# EAGLE board USB C Vertical Breakout-PTH-Panel (EAGLE 9.6.2), part 1 of 5
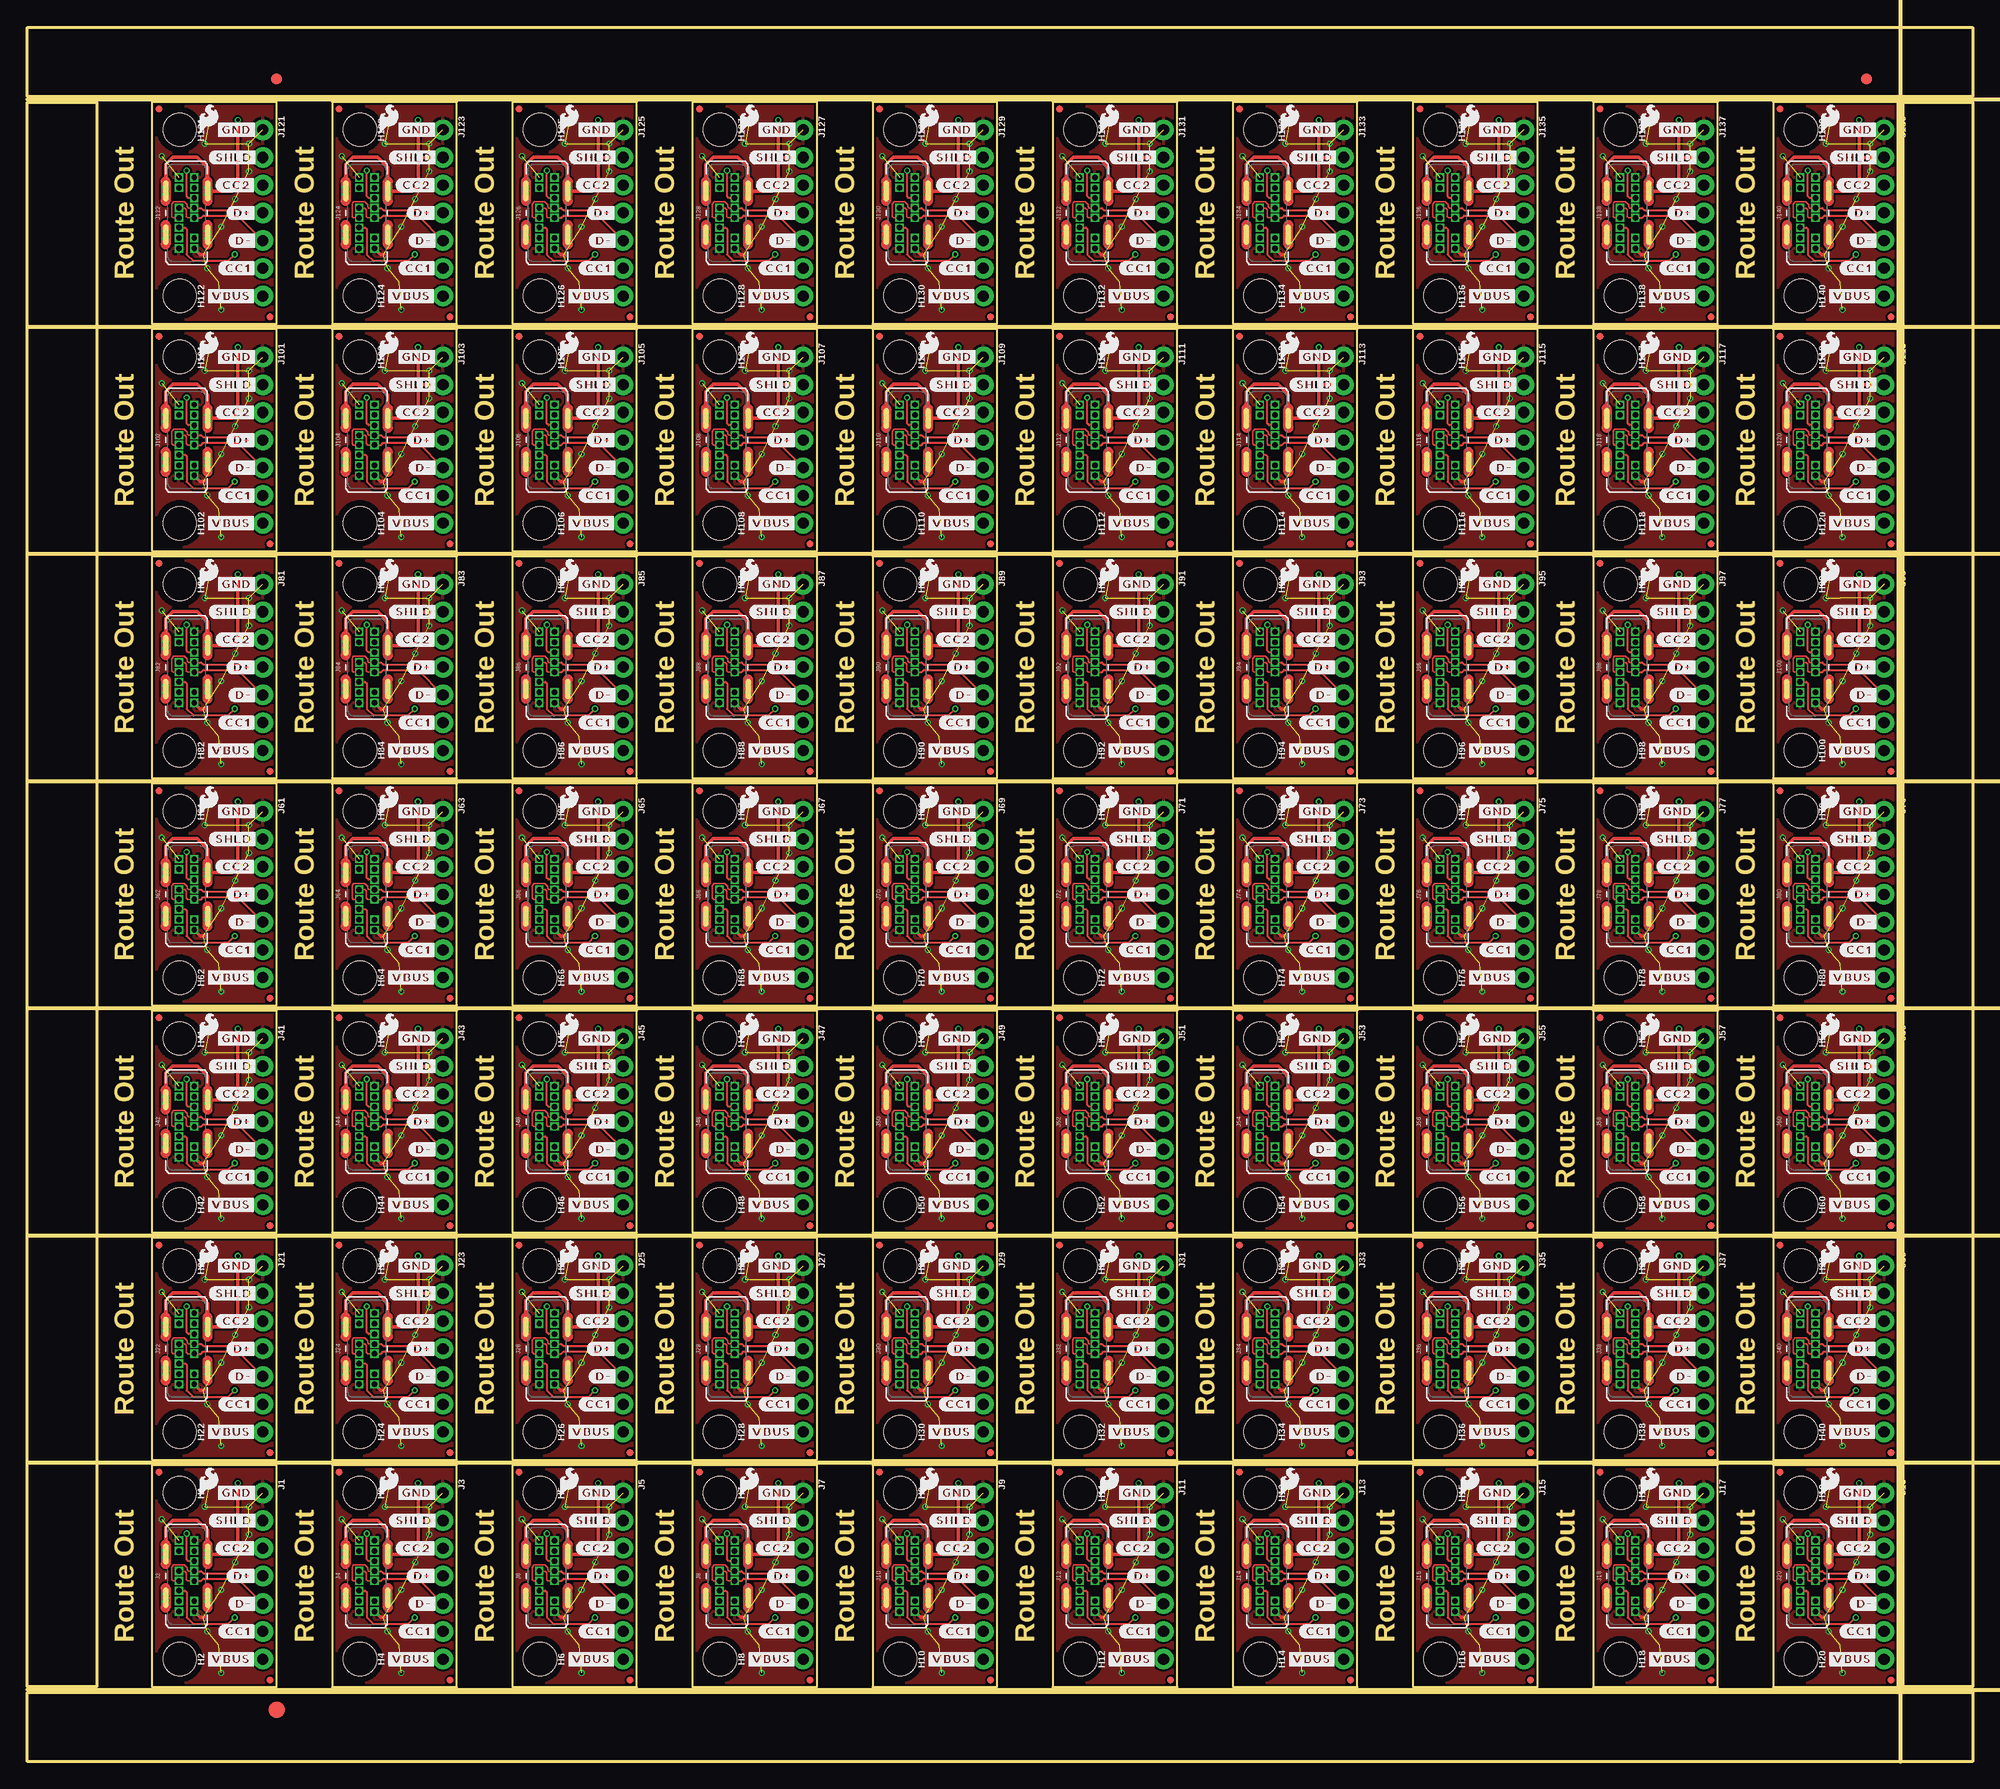
[diagram p0: board, top side]
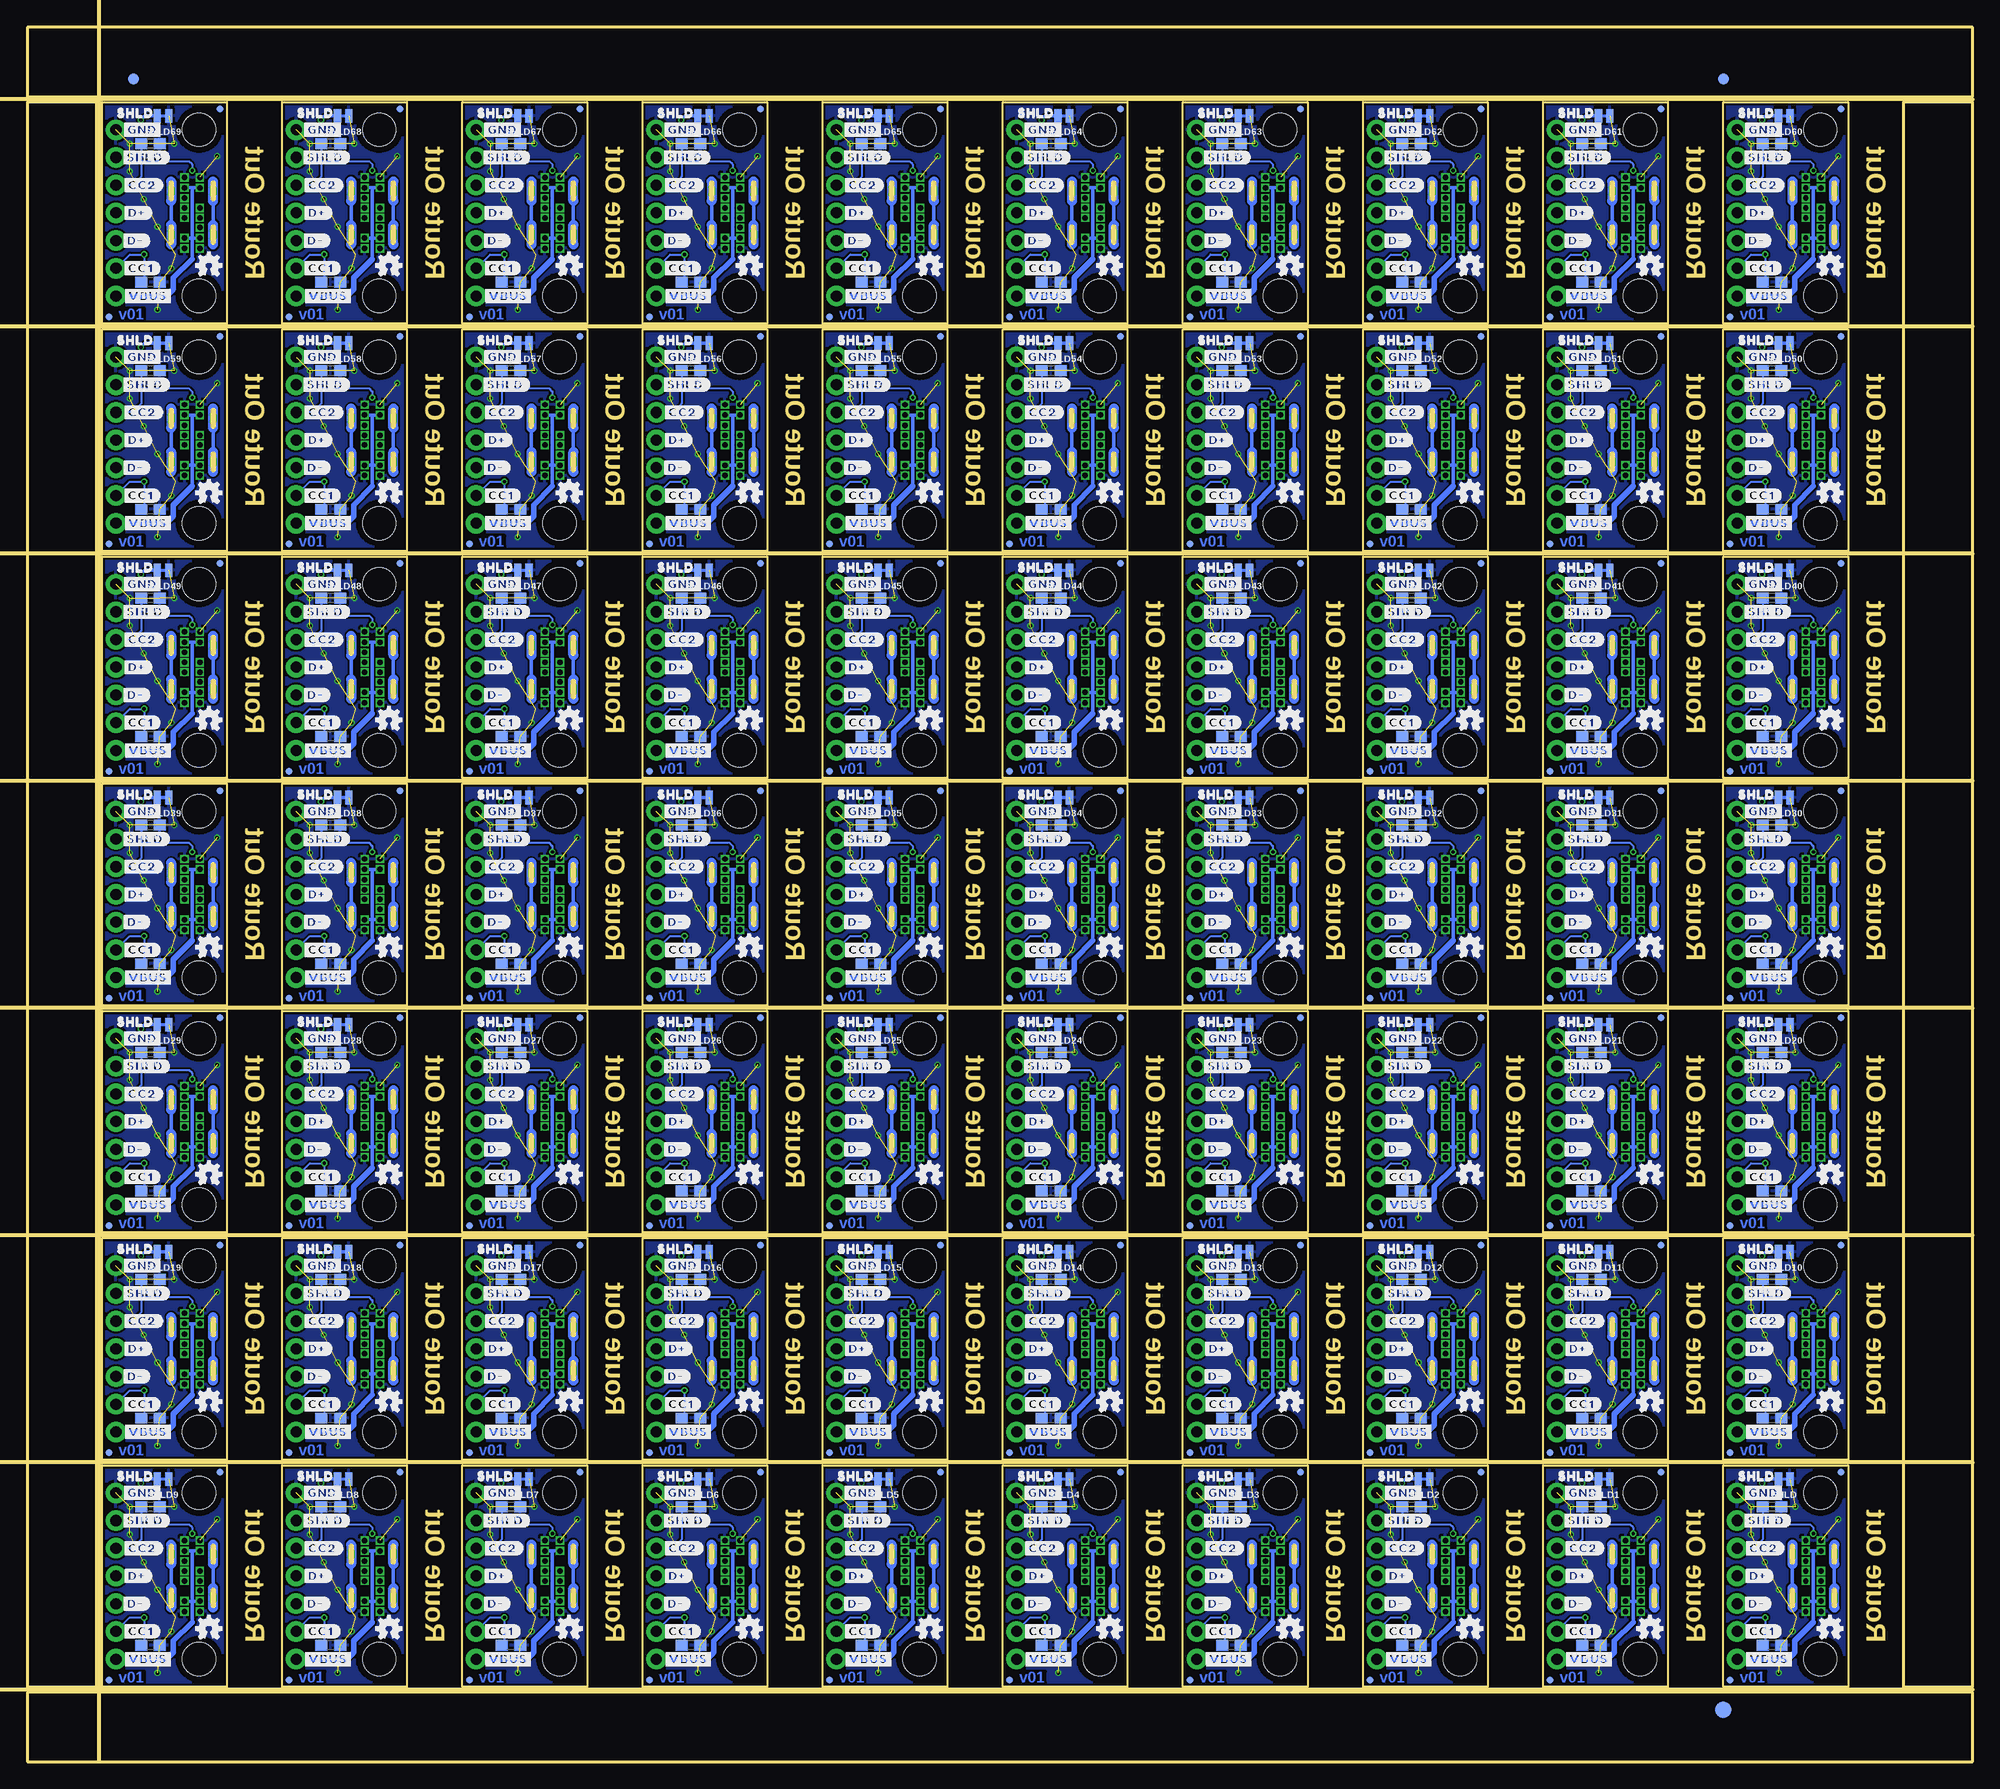
[diagram p1: board, bottom side, seen from below]

Size 178.31 x 159 mm. Coordinates in mm from the lower left corner, seen from the top.
Outline: 296 segments
Copper layers (1*16): Top 0.035mm / dielectric 1.5mm / Bottom 0.035mm
Design rules "USB C Vertical Breakout-PTH": minimum track width 5mil, minimum drill 0.3mm, track to track 5mil, track to pad 5mil, pad to pad 5mil, via to via 5mil, smd to smd 5mil, copper to edge 7mil, drill to drill 7mil, minimum pad ring 5mil, minimum via ring 5mil, stop-mask expansion 2.5mil, vias tented up to drill 25mil, thermal gap 10mil
Net classes: 0 default: width 0 mm, drill 0 mm
Milling: 9 lines

## Footprints (pad centres in the part's own frame; a part is rotated, then mirrored left to right if it is on the bottom)
FIDUCIAL-1X2 = smd 1 x 1: 1 0,0
FIDUCIAL-1.5X3 = smd 1.5 x 1.5: 1 0,0
FIDUCIAL-MICRO = smd 0.635 x 0.635: 1 0,0
STAND-OFF-TIGHT = hole 3.048: 0,0
1X07_NO_SILK = drill 1.016 pad 1.88: 1 0,0; 2 2.54,0; 3 5.08,0; 4 7.62,0; 5 10.16,0; 6 12.7,0; 7 15.24,0
USB-C-8P-2LAYER-VERTICAL-PTH = drill 0.5 pad 0.65 square: A1 -3.25,0.7; A4 -2.3,0.7; A5 -1.35,0.7; A6 -0.45,0.7; A7 0.45,0.7; A9 2.3,0.7; A12 3.25,0.7; B1 3.25,-0.7; B4 2.3,-0.7; B5 1.35,-0.7; B6 0.45,-0.7; B7 -0.45,-0.7; B9 -2.3,-0.7; B12 -3.25,-0.7 | drill 0.4 pad 0.6 long: SHLD1 -2,1.93; SHLD2 2,1.93; SHLD3 2,-1.93; SHLD4 -2,-1.93
0603 = smd 1.1 x 1: 1 -0.85,0; 2 0.85,0
SMT-JUMPER_2_NC_TRACE_NO-SILK = smd 0.66 x 1.27: 1 -0.521,0; 2 0.521,0

## Placement (x,y rotation side)
E$1  [FIDUCIAL-1X2]  22.86,154.24 0 top
E$2  [FIDUCIAL-1X2]  22.86,154.24 0 bottom
E$3  [FIDUCIAL-1X2]  168.59,154.24 0 top
E$4  [FIDUCIAL-1X2]  168.59,154.24 0 bottom
E$5  [FIDUCIAL-1.5X3]  22.86,4.76 0 top
E$6  [FIDUCIAL-1.5X3]  22.86,4.76 0 bottom
FD1  FIDUCIALUFIDUCIAL  [FIDUCIAL-MICRO]  12.06,26.54 90 top
FD2  FIDUCIALUFIDUCIAL  [FIDUCIAL-MICRO]  12.06,26.54 90 bottom
FD3  FIDUCIALUFIDUCIAL  [FIDUCIAL-MICRO]  22.23,7.49 270 top
FD4  FIDUCIALUFIDUCIAL  [FIDUCIAL-MICRO]  22.23,7.49 90 bottom
FD5  FIDUCIALUFIDUCIAL  [FIDUCIAL-MICRO]  28.57,26.54 90 top
FD6  FIDUCIALUFIDUCIAL  [FIDUCIAL-MICRO]  28.57,26.54 90 bottom
FD7  FIDUCIALUFIDUCIAL  [FIDUCIAL-MICRO]  38.73,7.49 270 top
FD8  FIDUCIALUFIDUCIAL  [FIDUCIAL-MICRO]  38.73,7.49 90 bottom
FD9  FIDUCIALUFIDUCIAL  [FIDUCIAL-MICRO]  45.09,26.54 90 top
FD10  FIDUCIALUFIDUCIAL  [FIDUCIAL-MICRO]  45.09,26.54 90 bottom
FD11  FIDUCIALUFIDUCIAL  [FIDUCIAL-MICRO]  55.24,7.49 270 top
FD12  FIDUCIALUFIDUCIAL  [FIDUCIAL-MICRO]  55.24,7.49 90 bottom
FD13  FIDUCIALUFIDUCIAL  [FIDUCIAL-MICRO]  61.59,26.54 90 top
FD14  FIDUCIALUFIDUCIAL  [FIDUCIAL-MICRO]  61.59,26.54 90 bottom
FD15  FIDUCIALUFIDUCIAL  [FIDUCIAL-MICRO]  71.75,7.49 270 top
FD16  FIDUCIALUFIDUCIAL  [FIDUCIAL-MICRO]  71.75,7.49 90 bottom
FD17  FIDUCIALUFIDUCIAL  [FIDUCIAL-MICRO]  78.1,26.54 90 top
FD18  FIDUCIALUFIDUCIAL  [FIDUCIAL-MICRO]  78.1,26.54 90 bottom
FD19  FIDUCIALUFIDUCIAL  [FIDUCIAL-MICRO]  88.26,7.49 270 top
FD20  FIDUCIALUFIDUCIAL  [FIDUCIAL-MICRO]  88.26,7.49 90 bottom
FD21  FIDUCIALUFIDUCIAL  [FIDUCIAL-MICRO]  94.62,26.54 90 top
FD22  FIDUCIALUFIDUCIAL  [FIDUCIAL-MICRO]  94.62,26.54 90 bottom
FD23  FIDUCIALUFIDUCIAL  [FIDUCIAL-MICRO]  104.78,7.49 270 top
FD24  FIDUCIALUFIDUCIAL  [FIDUCIAL-MICRO]  104.78,7.49 90 bottom
FD25  FIDUCIALUFIDUCIAL  [FIDUCIAL-MICRO]  111.12,26.54 90 top
FD26  FIDUCIALUFIDUCIAL  [FIDUCIAL-MICRO]  111.12,26.54 90 bottom
FD27  FIDUCIALUFIDUCIAL  [FIDUCIAL-MICRO]  121.28,7.49 270 top
FD28  FIDUCIALUFIDUCIAL  [FIDUCIAL-MICRO]  121.28,7.49 90 bottom
FD29  FIDUCIALUFIDUCIAL  [FIDUCIAL-MICRO]  127.63,26.54 90 top
FD30  FIDUCIALUFIDUCIAL  [FIDUCIAL-MICRO]  127.63,26.54 90 bottom
FD31  FIDUCIALUFIDUCIAL  [FIDUCIAL-MICRO]  137.79,7.49 270 top
FD32  FIDUCIALUFIDUCIAL  [FIDUCIAL-MICRO]  137.79,7.49 90 bottom
FD33  FIDUCIALUFIDUCIAL  [FIDUCIAL-MICRO]  144.15,26.54 90 top
FD34  FIDUCIALUFIDUCIAL  [FIDUCIAL-MICRO]  144.15,26.54 90 bottom
FD35  FIDUCIALUFIDUCIAL  [FIDUCIAL-MICRO]  154.31,7.49 270 top
FD36  FIDUCIALUFIDUCIAL  [FIDUCIAL-MICRO]  154.31,7.49 90 bottom
FD37  FIDUCIALUFIDUCIAL  [FIDUCIAL-MICRO]  160.66,26.54 90 top
FD38  FIDUCIALUFIDUCIAL  [FIDUCIAL-MICRO]  160.66,26.54 90 bottom
FD39  FIDUCIALUFIDUCIAL  [FIDUCIAL-MICRO]  170.81,7.49 270 top
FD40  FIDUCIALUFIDUCIAL  [FIDUCIAL-MICRO]  170.81,7.49 90 bottom
FD41  FIDUCIALUFIDUCIAL  [FIDUCIAL-MICRO]  12.06,47.37 90 top
FD42  FIDUCIALUFIDUCIAL  [FIDUCIAL-MICRO]  12.06,47.37 90 bottom
FD43  FIDUCIALUFIDUCIAL  [FIDUCIAL-MICRO]  22.23,28.32 270 top
FD44  FIDUCIALUFIDUCIAL  [FIDUCIAL-MICRO]  22.23,28.32 90 bottom
FD45  FIDUCIALUFIDUCIAL  [FIDUCIAL-MICRO]  28.57,47.37 90 top
FD46  FIDUCIALUFIDUCIAL  [FIDUCIAL-MICRO]  28.57,47.37 90 bottom
FD47  FIDUCIALUFIDUCIAL  [FIDUCIAL-MICRO]  38.73,28.32 270 top
FD48  FIDUCIALUFIDUCIAL  [FIDUCIAL-MICRO]  38.73,28.32 90 bottom
FD49  FIDUCIALUFIDUCIAL  [FIDUCIAL-MICRO]  45.09,47.37 90 top
FD50  FIDUCIALUFIDUCIAL  [FIDUCIAL-MICRO]  45.09,47.37 90 bottom
FD51  FIDUCIALUFIDUCIAL  [FIDUCIAL-MICRO]  55.24,28.32 270 top
FD52  FIDUCIALUFIDUCIAL  [FIDUCIAL-MICRO]  55.24,28.32 90 bottom
FD53  FIDUCIALUFIDUCIAL  [FIDUCIAL-MICRO]  61.59,47.37 90 top
FD54  FIDUCIALUFIDUCIAL  [FIDUCIAL-MICRO]  61.59,47.37 90 bottom
FD55  FIDUCIALUFIDUCIAL  [FIDUCIAL-MICRO]  71.75,28.32 270 top
FD56  FIDUCIALUFIDUCIAL  [FIDUCIAL-MICRO]  71.75,28.32 90 bottom
FD57  FIDUCIALUFIDUCIAL  [FIDUCIAL-MICRO]  78.1,47.37 90 top
FD58  FIDUCIALUFIDUCIAL  [FIDUCIAL-MICRO]  78.1,47.37 90 bottom
FD59  FIDUCIALUFIDUCIAL  [FIDUCIAL-MICRO]  88.26,28.32 270 top
FD60  FIDUCIALUFIDUCIAL  [FIDUCIAL-MICRO]  88.26,28.32 90 bottom
FD61  FIDUCIALUFIDUCIAL  [FIDUCIAL-MICRO]  94.62,47.37 90 top
FD62  FIDUCIALUFIDUCIAL  [FIDUCIAL-MICRO]  94.62,47.37 90 bottom
FD63  FIDUCIALUFIDUCIAL  [FIDUCIAL-MICRO]  104.78,28.32 270 top
FD64  FIDUCIALUFIDUCIAL  [FIDUCIAL-MICRO]  104.78,28.32 90 bottom
FD65  FIDUCIALUFIDUCIAL  [FIDUCIAL-MICRO]  111.12,47.37 90 top
FD66  FIDUCIALUFIDUCIAL  [FIDUCIAL-MICRO]  111.12,47.37 90 bottom
FD67  FIDUCIALUFIDUCIAL  [FIDUCIAL-MICRO]  121.28,28.32 270 top
FD68  FIDUCIALUFIDUCIAL  [FIDUCIAL-MICRO]  121.28,28.32 90 bottom
FD69  FIDUCIALUFIDUCIAL  [FIDUCIAL-MICRO]  127.63,47.37 90 top
FD70  FIDUCIALUFIDUCIAL  [FIDUCIAL-MICRO]  127.63,47.37 90 bottom
FD71  FIDUCIALUFIDUCIAL  [FIDUCIAL-MICRO]  137.79,28.32 270 top
FD72  FIDUCIALUFIDUCIAL  [FIDUCIAL-MICRO]  137.79,28.32 90 bottom
FD73  FIDUCIALUFIDUCIAL  [FIDUCIAL-MICRO]  144.15,47.37 90 top
FD74  FIDUCIALUFIDUCIAL  [FIDUCIAL-MICRO]  144.15,47.37 90 bottom
FD75  FIDUCIALUFIDUCIAL  [FIDUCIAL-MICRO]  154.31,28.32 270 top
FD76  FIDUCIALUFIDUCIAL  [FIDUCIAL-MICRO]  154.31,28.32 90 bottom
FD77  FIDUCIALUFIDUCIAL  [FIDUCIAL-MICRO]  160.66,47.37 90 top
FD78  FIDUCIALUFIDUCIAL  [FIDUCIAL-MICRO]  160.66,47.37 90 bottom
FD79  FIDUCIALUFIDUCIAL  [FIDUCIAL-MICRO]  170.81,28.32 270 top
FD80  FIDUCIALUFIDUCIAL  [FIDUCIAL-MICRO]  170.81,28.32 90 bottom
FD81  FIDUCIALUFIDUCIAL  [FIDUCIAL-MICRO]  12.06,68.2 90 top
FD82  FIDUCIALUFIDUCIAL  [FIDUCIAL-MICRO]  12.06,68.2 90 bottom
FD83  FIDUCIALUFIDUCIAL  [FIDUCIAL-MICRO]  22.23,49.15 270 top
FD84  FIDUCIALUFIDUCIAL  [FIDUCIAL-MICRO]  22.23,49.15 90 bottom
FD85  FIDUCIALUFIDUCIAL  [FIDUCIAL-MICRO]  28.57,68.2 90 top
FD86  FIDUCIALUFIDUCIAL  [FIDUCIAL-MICRO]  28.57,68.2 90 bottom
FD87  FIDUCIALUFIDUCIAL  [FIDUCIAL-MICRO]  38.73,49.15 270 top
FD88  FIDUCIALUFIDUCIAL  [FIDUCIAL-MICRO]  38.73,49.15 90 bottom
FD89  FIDUCIALUFIDUCIAL  [FIDUCIAL-MICRO]  45.09,68.2 90 top
FD90  FIDUCIALUFIDUCIAL  [FIDUCIAL-MICRO]  45.09,68.2 90 bottom
FD91  FIDUCIALUFIDUCIAL  [FIDUCIAL-MICRO]  55.24,49.15 270 top
FD92  FIDUCIALUFIDUCIAL  [FIDUCIAL-MICRO]  55.24,49.15 90 bottom
FD93  FIDUCIALUFIDUCIAL  [FIDUCIAL-MICRO]  61.59,68.2 90 top
FD94  FIDUCIALUFIDUCIAL  [FIDUCIAL-MICRO]  61.59,68.2 90 bottom
FD95  FIDUCIALUFIDUCIAL  [FIDUCIAL-MICRO]  71.75,49.15 270 top
FD96  FIDUCIALUFIDUCIAL  [FIDUCIAL-MICRO]  71.75,49.15 90 bottom
FD97  FIDUCIALUFIDUCIAL  [FIDUCIAL-MICRO]  78.1,68.2 90 top
FD98  FIDUCIALUFIDUCIAL  [FIDUCIAL-MICRO]  78.1,68.2 90 bottom
FD99  FIDUCIALUFIDUCIAL  [FIDUCIAL-MICRO]  88.26,49.15 270 top
FD100  FIDUCIALUFIDUCIAL  [FIDUCIAL-MICRO]  88.26,49.15 90 bottom
FD101  FIDUCIALUFIDUCIAL  [FIDUCIAL-MICRO]  94.62,68.2 90 top
FD102  FIDUCIALUFIDUCIAL  [FIDUCIAL-MICRO]  94.62,68.2 90 bottom
FD103  FIDUCIALUFIDUCIAL  [FIDUCIAL-MICRO]  104.78,49.15 270 top
FD104  FIDUCIALUFIDUCIAL  [FIDUCIAL-MICRO]  104.78,49.15 90 bottom
FD105  FIDUCIALUFIDUCIAL  [FIDUCIAL-MICRO]  111.12,68.2 90 top
FD106  FIDUCIALUFIDUCIAL  [FIDUCIAL-MICRO]  111.12,68.2 90 bottom
FD107  FIDUCIALUFIDUCIAL  [FIDUCIAL-MICRO]  121.28,49.15 270 top
FD108  FIDUCIALUFIDUCIAL  [FIDUCIAL-MICRO]  121.28,49.15 90 bottom
FD109  FIDUCIALUFIDUCIAL  [FIDUCIAL-MICRO]  127.63,68.2 90 top
FD110  FIDUCIALUFIDUCIAL  [FIDUCIAL-MICRO]  127.63,68.2 90 bottom
FD111  FIDUCIALUFIDUCIAL  [FIDUCIAL-MICRO]  137.79,49.15 270 top
FD112  FIDUCIALUFIDUCIAL  [FIDUCIAL-MICRO]  137.79,49.15 90 bottom
FD113  FIDUCIALUFIDUCIAL  [FIDUCIAL-MICRO]  144.15,68.2 90 top
FD114  FIDUCIALUFIDUCIAL  [FIDUCIAL-MICRO]  144.15,68.2 90 bottom
FD115  FIDUCIALUFIDUCIAL  [FIDUCIAL-MICRO]  154.31,49.15 270 top
FD116  FIDUCIALUFIDUCIAL  [FIDUCIAL-MICRO]  154.31,49.15 90 bottom
FD117  FIDUCIALUFIDUCIAL  [FIDUCIAL-MICRO]  160.66,68.2 90 top
FD118  FIDUCIALUFIDUCIAL  [FIDUCIAL-MICRO]  160.66,68.2 90 bottom
FD119  FIDUCIALUFIDUCIAL  [FIDUCIAL-MICRO]  170.81,49.15 270 top
FD120  FIDUCIALUFIDUCIAL  [FIDUCIAL-MICRO]  170.81,49.15 90 bottom
FD121  FIDUCIALUFIDUCIAL  [FIDUCIAL-MICRO]  12.06,89.03 90 top
FD122  FIDUCIALUFIDUCIAL  [FIDUCIAL-MICRO]  12.06,89.03 90 bottom
FD123  FIDUCIALUFIDUCIAL  [FIDUCIAL-MICRO]  22.23,69.98 270 top
FD124  FIDUCIALUFIDUCIAL  [FIDUCIAL-MICRO]  22.23,69.98 90 bottom
FD125  FIDUCIALUFIDUCIAL  [FIDUCIAL-MICRO]  28.57,89.03 90 top
FD126  FIDUCIALUFIDUCIAL  [FIDUCIAL-MICRO]  28.57,89.03 90 bottom
FD127  FIDUCIALUFIDUCIAL  [FIDUCIAL-MICRO]  38.73,69.98 270 top
FD128  FIDUCIALUFIDUCIAL  [FIDUCIAL-MICRO]  38.73,69.98 90 bottom
FD129  FIDUCIALUFIDUCIAL  [FIDUCIAL-MICRO]  45.09,89.03 90 top
FD130  FIDUCIALUFIDUCIAL  [FIDUCIAL-MICRO]  45.09,89.03 90 bottom
FD131  FIDUCIALUFIDUCIAL  [FIDUCIAL-MICRO]  55.24,69.98 270 top
FD132  FIDUCIALUFIDUCIAL  [FIDUCIAL-MICRO]  55.24,69.98 90 bottom
FD133  FIDUCIALUFIDUCIAL  [FIDUCIAL-MICRO]  61.59,89.03 90 top
FD134  FIDUCIALUFIDUCIAL  [FIDUCIAL-MICRO]  61.59,89.03 90 bottom
FD135  FIDUCIALUFIDUCIAL  [FIDUCIAL-MICRO]  71.75,69.98 270 top
FD136  FIDUCIALUFIDUCIAL  [FIDUCIAL-MICRO]  71.75,69.98 90 bottom
FD137  FIDUCIALUFIDUCIAL  [FIDUCIAL-MICRO]  78.1,89.03 90 top
FD138  FIDUCIALUFIDUCIAL  [FIDUCIAL-MICRO]  78.1,89.03 90 bottom
FD139  FIDUCIALUFIDUCIAL  [FIDUCIAL-MICRO]  88.26,69.98 270 top
FD140  FIDUCIALUFIDUCIAL  [FIDUCIAL-MICRO]  88.26,69.98 90 bottom
FD141  FIDUCIALUFIDUCIAL  [FIDUCIAL-MICRO]  94.62,89.03 90 top
FD142  FIDUCIALUFIDUCIAL  [FIDUCIAL-MICRO]  94.62,89.03 90 bottom
FD143  FIDUCIALUFIDUCIAL  [FIDUCIAL-MICRO]  104.78,69.98 270 top
FD144  FIDUCIALUFIDUCIAL  [FIDUCIAL-MICRO]  104.78,69.98 90 bottom
FD145  FIDUCIALUFIDUCIAL  [FIDUCIAL-MICRO]  111.12,89.03 90 top
FD146  FIDUCIALUFIDUCIAL  [FIDUCIAL-MICRO]  111.12,89.03 90 bottom
FD147  FIDUCIALUFIDUCIAL  [FIDUCIAL-MICRO]  121.28,69.98 270 top
FD148  FIDUCIALUFIDUCIAL  [FIDUCIAL-MICRO]  121.28,69.98 90 bottom
FD149  FIDUCIALUFIDUCIAL  [FIDUCIAL-MICRO]  127.63,89.03 90 top
FD150  FIDUCIALUFIDUCIAL  [FIDUCIAL-MICRO]  127.63,89.03 90 bottom
FD151  FIDUCIALUFIDUCIAL  [FIDUCIAL-MICRO]  137.79,69.98 270 top
FD152  FIDUCIALUFIDUCIAL  [FIDUCIAL-MICRO]  137.79,69.98 90 bottom
FD153  FIDUCIALUFIDUCIAL  [FIDUCIAL-MICRO]  144.15,89.03 90 top
FD154  FIDUCIALUFIDUCIAL  [FIDUCIAL-MICRO]  144.15,89.03 90 bottom
FD155  FIDUCIALUFIDUCIAL  [FIDUCIAL-MICRO]  154.31,69.98 270 top
FD156  FIDUCIALUFIDUCIAL  [FIDUCIAL-MICRO]  154.31,69.98 90 bottom
FD157  FIDUCIALUFIDUCIAL  [FIDUCIAL-MICRO]  160.66,89.03 90 top
FD158  FIDUCIALUFIDUCIAL  [FIDUCIAL-MICRO]  160.66,89.03 90 bottom
FD159  FIDUCIALUFIDUCIAL  [FIDUCIAL-MICRO]  170.81,69.98 270 top
FD160  FIDUCIALUFIDUCIAL  [FIDUCIAL-MICRO]  170.81,69.98 90 bottom
FD161  FIDUCIALUFIDUCIAL  [FIDUCIAL-MICRO]  12.06,109.86 90 top
FD162  FIDUCIALUFIDUCIAL  [FIDUCIAL-MICRO]  12.06,109.86 90 bottom
FD163  FIDUCIALUFIDUCIAL  [FIDUCIAL-MICRO]  22.23,90.81 270 top
FD164  FIDUCIALUFIDUCIAL  [FIDUCIAL-MICRO]  22.23,90.81 90 bottom
FD165  FIDUCIALUFIDUCIAL  [FIDUCIAL-MICRO]  28.57,109.86 90 top
FD166  FIDUCIALUFIDUCIAL  [FIDUCIAL-MICRO]  28.57,109.86 90 bottom
FD167  FIDUCIALUFIDUCIAL  [FIDUCIAL-MICRO]  38.73,90.81 270 top
FD168  FIDUCIALUFIDUCIAL  [FIDUCIAL-MICRO]  38.73,90.81 90 bottom
FD169  FIDUCIALUFIDUCIAL  [FIDUCIAL-MICRO]  45.09,109.86 90 top
FD170  FIDUCIALUFIDUCIAL  [FIDUCIAL-MICRO]  45.09,109.86 90 bottom
FD171  FIDUCIALUFIDUCIAL  [FIDUCIAL-MICRO]  55.24,90.81 270 top
FD172  FIDUCIALUFIDUCIAL  [FIDUCIAL-MICRO]  55.24,90.81 90 bottom
FD173  FIDUCIALUFIDUCIAL  [FIDUCIAL-MICRO]  61.59,109.86 90 top
FD174  FIDUCIALUFIDUCIAL  [FIDUCIAL-MICRO]  61.59,109.86 90 bottom
FD175  FIDUCIALUFIDUCIAL  [FIDUCIAL-MICRO]  71.75,90.81 270 top
FD176  FIDUCIALUFIDUCIAL  [FIDUCIAL-MICRO]  71.75,90.81 90 bottom
FD177  FIDUCIALUFIDUCIAL  [FIDUCIAL-MICRO]  78.1,109.86 90 top
FD178  FIDUCIALUFIDUCIAL  [FIDUCIAL-MICRO]  78.1,109.86 90 bottom
FD179  FIDUCIALUFIDUCIAL  [FIDUCIAL-MICRO]  88.26,90.81 270 top
FD180  FIDUCIALUFIDUCIAL  [FIDUCIAL-MICRO]  88.26,90.81 90 bottom
FD181  FIDUCIALUFIDUCIAL  [FIDUCIAL-MICRO]  94.62,109.86 90 top
FD182  FIDUCIALUFIDUCIAL  [FIDUCIAL-MICRO]  94.62,109.86 90 bottom
FD183  FIDUCIALUFIDUCIAL  [FIDUCIAL-MICRO]  104.78,90.81 270 top
FD184  FIDUCIALUFIDUCIAL  [FIDUCIAL-MICRO]  104.78,90.81 90 bottom
FD185  FIDUCIALUFIDUCIAL  [FIDUCIAL-MICRO]  111.12,109.86 90 top
FD186  FIDUCIALUFIDUCIAL  [FIDUCIAL-MICRO]  111.12,109.86 90 bottom
FD187  FIDUCIALUFIDUCIAL  [FIDUCIAL-MICRO]  121.28,90.81 270 top
FD188  FIDUCIALUFIDUCIAL  [FIDUCIAL-MICRO]  121.28,90.81 90 bottom
FD189  FIDUCIALUFIDUCIAL  [FIDUCIAL-MICRO]  127.63,109.86 90 top
FD190  FIDUCIALUFIDUCIAL  [FIDUCIAL-MICRO]  127.63,109.86 90 bottom
FD191  FIDUCIALUFIDUCIAL  [FIDUCIAL-MICRO]  137.79,90.81 270 top
FD192  FIDUCIALUFIDUCIAL  [FIDUCIAL-MICRO]  137.79,90.81 90 bottom
FD193  FIDUCIALUFIDUCIAL  [FIDUCIAL-MICRO]  144.15,109.86 90 top
FD194  FIDUCIALUFIDUCIAL  [FIDUCIAL-MICRO]  144.15,109.86 90 bottom
FD195  FIDUCIALUFIDUCIAL  [FIDUCIAL-MICRO]  154.31,90.81 270 top
FD196  FIDUCIALUFIDUCIAL  [FIDUCIAL-MICRO]  154.31,90.81 90 bottom
FD197  FIDUCIALUFIDUCIAL  [FIDUCIAL-MICRO]  160.66,109.86 90 top
FD198  FIDUCIALUFIDUCIAL  [FIDUCIAL-MICRO]  160.66,109.86 90 bottom
FD199  FIDUCIALUFIDUCIAL  [FIDUCIAL-MICRO]  170.81,90.81 270 top
FD200  FIDUCIALUFIDUCIAL  [FIDUCIAL-MICRO]  170.81,90.81 90 bottom
FD201  FIDUCIALUFIDUCIAL  [FIDUCIAL-MICRO]  12.06,130.68 90 top
FD202  FIDUCIALUFIDUCIAL  [FIDUCIAL-MICRO]  12.06,130.68 90 bottom
FD203  FIDUCIALUFIDUCIAL  [FIDUCIAL-MICRO]  22.23,111.63 270 top
FD204  FIDUCIALUFIDUCIAL  [FIDUCIAL-MICRO]  22.23,111.63 90 bottom
FD205  FIDUCIALUFIDUCIAL  [FIDUCIAL-MICRO]  28.57,130.68 90 top
FD206  FIDUCIALUFIDUCIAL  [FIDUCIAL-MICRO]  28.57,130.68 90 bottom
FD207  FIDUCIALUFIDUCIAL  [FIDUCIAL-MICRO]  38.73,111.63 270 top
FD208  FIDUCIALUFIDUCIAL  [FIDUCIAL-MICRO]  38.73,111.63 90 bottom
FD209  FIDUCIALUFIDUCIAL  [FIDUCIAL-MICRO]  45.09,130.68 90 top
FD210  FIDUCIALUFIDUCIAL  [FIDUCIAL-MICRO]  45.09,130.68 90 bottom
FD211  FIDUCIALUFIDUCIAL  [FIDUCIAL-MICRO]  55.24,111.63 270 top
FD212  FIDUCIALUFIDUCIAL  [FIDUCIAL-MICRO]  55.24,111.63 90 bottom
FD213  FIDUCIALUFIDUCIAL  [FIDUCIAL-MICRO]  61.59,130.68 90 top
FD214  FIDUCIALUFIDUCIAL  [FIDUCIAL-MICRO]  61.59,130.68 90 bottom
FD215  FIDUCIALUFIDUCIAL  [FIDUCIAL-MICRO]  71.75,111.63 270 top
FD216  FIDUCIALUFIDUCIAL  [FIDUCIAL-MICRO]  71.75,111.63 90 bottom
FD217  FIDUCIALUFIDUCIAL  [FIDUCIAL-MICRO]  78.1,130.68 90 top
FD218  FIDUCIALUFIDUCIAL  [FIDUCIAL-MICRO]  78.1,130.68 90 bottom
FD219  FIDUCIALUFIDUCIAL  [FIDUCIAL-MICRO]  88.26,111.63 270 top
FD220  FIDUCIALUFIDUCIAL  [FIDUCIAL-MICRO]  88.26,111.63 90 bottom
FD221  FIDUCIALUFIDUCIAL  [FIDUCIAL-MICRO]  94.62,130.68 90 top
FD222  FIDUCIALUFIDUCIAL  [FIDUCIAL-MICRO]  94.62,130.68 90 bottom
FD223  FIDUCIALUFIDUCIAL  [FIDUCIAL-MICRO]  104.78,111.63 270 top
FD224  FIDUCIALUFIDUCIAL  [FIDUCIAL-MICRO]  104.78,111.63 90 bottom
FD225  FIDUCIALUFIDUCIAL  [FIDUCIAL-MICRO]  111.12,130.68 90 top
FD226  FIDUCIALUFIDUCIAL  [FIDUCIAL-MICRO]  111.12,130.68 90 bottom
FD227  FIDUCIALUFIDUCIAL  [FIDUCIAL-MICRO]  121.28,111.63 270 top
FD228  FIDUCIALUFIDUCIAL  [FIDUCIAL-MICRO]  121.28,111.63 90 bottom
FD229  FIDUCIALUFIDUCIAL  [FIDUCIAL-MICRO]  127.63,130.68 90 top
FD230  FIDUCIALUFIDUCIAL  [FIDUCIAL-MICRO]  127.63,130.68 90 bottom
FD231  FIDUCIALUFIDUCIAL  [FIDUCIAL-MICRO]  137.79,111.63 270 top
FD232  FIDUCIALUFIDUCIAL  [FIDUCIAL-MICRO]  137.79,111.63 90 bottom
FD233  FIDUCIALUFIDUCIAL  [FIDUCIAL-MICRO]  144.15,130.68 90 top
FD234  FIDUCIALUFIDUCIAL  [FIDUCIAL-MICRO]  144.15,130.68 90 bottom
FD235  FIDUCIALUFIDUCIAL  [FIDUCIAL-MICRO]  154.31,111.63 270 top
FD236  FIDUCIALUFIDUCIAL  [FIDUCIAL-MICRO]  154.31,111.63 90 bottom
FD237  FIDUCIALUFIDUCIAL  [FIDUCIAL-MICRO]  160.66,130.68 90 top
FD238  FIDUCIALUFIDUCIAL  [FIDUCIAL-MICRO]  160.66,130.68 90 bottom
FD239  FIDUCIALUFIDUCIAL  [FIDUCIAL-MICRO]  170.81,111.63 270 top
FD240  FIDUCIALUFIDUCIAL  [FIDUCIAL-MICRO]  170.81,111.63 90 bottom
FD241  FIDUCIALUFIDUCIAL  [FIDUCIAL-MICRO]  12.06,151.51 90 top
FD242  FIDUCIALUFIDUCIAL  [FIDUCIAL-MICRO]  12.06,151.51 90 bottom
FD243  FIDUCIALUFIDUCIAL  [FIDUCIAL-MICRO]  22.23,132.46 270 top
FD244  FIDUCIALUFIDUCIAL  [FIDUCIAL-MICRO]  22.23,132.46 90 bottom
FD245  FIDUCIALUFIDUCIAL  [FIDUCIAL-MICRO]  28.57,151.51 90 top
FD246  FIDUCIALUFIDUCIAL  [FIDUCIAL-MICRO]  28.57,151.51 90 bottom
FD247  FIDUCIALUFIDUCIAL  [FIDUCIAL-MICRO]  38.73,132.46 270 top
FD248  FIDUCIALUFIDUCIAL  [FIDUCIAL-MICRO]  38.73,132.46 90 bottom
FD249  FIDUCIALUFIDUCIAL  [FIDUCIAL-MICRO]  45.09,151.51 90 top
FD250  FIDUCIALUFIDUCIAL  [FIDUCIAL-MICRO]  45.09,151.51 90 bottom
FD251  FIDUCIALUFIDUCIAL  [FIDUCIAL-MICRO]  55.24,132.46 270 top
FD252  FIDUCIALUFIDUCIAL  [FIDUCIAL-MICRO]  55.24,132.46 90 bottom
FD253  FIDUCIALUFIDUCIAL  [FIDUCIAL-MICRO]  61.59,151.51 90 top
FD254  FIDUCIALUFIDUCIAL  [FIDUCIAL-MICRO]  61.59,151.51 90 bottom
FD255  FIDUCIALUFIDUCIAL  [FIDUCIAL-MICRO]  71.75,132.46 270 top
FD256  FIDUCIALUFIDUCIAL  [FIDUCIAL-MICRO]  71.75,132.46 90 bottom
FD257  FIDUCIALUFIDUCIAL  [FIDUCIAL-MICRO]  78.1,151.51 90 top
FD258  FIDUCIALUFIDUCIAL  [FIDUCIAL-MICRO]  78.1,151.51 90 bottom
FD259  FIDUCIALUFIDUCIAL  [FIDUCIAL-MICRO]  88.26,132.46 270 top
FD260  FIDUCIALUFIDUCIAL  [FIDUCIAL-MICRO]  88.26,132.46 90 bottom
FD261  FIDUCIALUFIDUCIAL  [FIDUCIAL-MICRO]  94.62,151.51 90 top
FD262  FIDUCIALUFIDUCIAL  [FIDUCIAL-MICRO]  94.62,151.51 90 bottom
FD263  FIDUCIALUFIDUCIAL  [FIDUCIAL-MICRO]  104.78,132.46 270 top
FD264  FIDUCIALUFIDUCIAL  [FIDUCIAL-MICRO]  104.78,132.46 90 bottom
FD265  FIDUCIALUFIDUCIAL  [FIDUCIAL-MICRO]  111.12,151.51 90 top
FD266  FIDUCIALUFIDUCIAL  [FIDUCIAL-MICRO]  111.12,151.51 90 bottom
FD267  FIDUCIALUFIDUCIAL  [FIDUCIAL-MICRO]  121.28,132.46 270 top
FD268  FIDUCIALUFIDUCIAL  [FIDUCIAL-MICRO]  121.28,132.46 90 bottom
FD269  FIDUCIALUFIDUCIAL  [FIDUCIAL-MICRO]  127.63,151.51 90 top
FD270  FIDUCIALUFIDUCIAL  [FIDUCIAL-MICRO]  127.63,151.51 90 bottom
FD271  FIDUCIALUFIDUCIAL  [FIDUCIAL-MICRO]  137.79,132.46 270 top
FD272  FIDUCIALUFIDUCIAL  [FIDUCIAL-MICRO]  137.79,132.46 90 bottom
FD273  FIDUCIALUFIDUCIAL  [FIDUCIAL-MICRO]  144.15,151.51 90 top
FD274  FIDUCIALUFIDUCIAL  [FIDUCIAL-MICRO]  144.15,151.51 90 bottom
FD275  FIDUCIALUFIDUCIAL  [FIDUCIAL-MICRO]  154.31,132.46 270 top
FD276  FIDUCIALUFIDUCIAL  [FIDUCIAL-MICRO]  154.31,132.46 90 bottom
FD277  FIDUCIALUFIDUCIAL  [FIDUCIAL-MICRO]  160.66,151.51 90 top
FD278  FIDUCIALUFIDUCIAL  [FIDUCIAL-MICRO]  160.66,151.51 90 bottom
FD279  FIDUCIALUFIDUCIAL  [FIDUCIAL-MICRO]  170.81,132.46 270 top
FD280  FIDUCIALUFIDUCIAL  [FIDUCIAL-MICRO]  170.81,132.46 90 bottom
H1  STAND-OFFTIGHT  [STAND-OFF-TIGHT]  13.97,24.64 270 top
H2  STAND-OFFTIGHT  [STAND-OFF-TIGHT]  13.97,9.4 270 top
H3  STAND-OFFTIGHT  [STAND-OFF-TIGHT]  30.48,24.64 270 top
H4  STAND-OFFTIGHT  [STAND-OFF-TIGHT]  30.48,9.4 270 top
H5  STAND-OFFTIGHT  [STAND-OFF-TIGHT]  46.99,24.64 270 top
H6  STAND-OFFTIGHT  [STAND-OFF-TIGHT]  46.99,9.4 270 top
H7  STAND-OFFTIGHT  [STAND-OFF-TIGHT]  63.5,24.64 270 top
H8  STAND-OFFTIGHT  [STAND-OFF-TIGHT]  63.5,9.4 270 top
H9  STAND-OFFTIGHT  [STAND-OFF-TIGHT]  80.01,24.64 270 top
H10  STAND-OFFTIGHT  [STAND-OFF-TIGHT]  80.01,9.4 270 top
H11  STAND-OFFTIGHT  [STAND-OFF-TIGHT]  96.52,24.64 270 top
H12  STAND-OFFTIGHT  [STAND-OFF-TIGHT]  96.52,9.4 270 top
H13  STAND-OFFTIGHT  [STAND-OFF-TIGHT]  113.03,24.64 270 top
H14  STAND-OFFTIGHT  [STAND-OFF-TIGHT]  113.03,9.4 270 top
H15  STAND-OFFTIGHT  [STAND-OFF-TIGHT]  129.54,24.64 270 top
H16  STAND-OFFTIGHT  [STAND-OFF-TIGHT]  129.54,9.4 270 top
H17  STAND-OFFTIGHT  [STAND-OFF-TIGHT]  146.05,24.64 270 top
H18  STAND-OFFTIGHT  [STAND-OFF-TIGHT]  146.05,9.4 270 top
H19  STAND-OFFTIGHT  [STAND-OFF-TIGHT]  162.56,24.64 270 top
H20  STAND-OFFTIGHT  [STAND-OFF-TIGHT]  162.56,9.4 270 top
H21  STAND-OFFTIGHT  [STAND-OFF-TIGHT]  13.97,45.47 270 top
H22  STAND-OFFTIGHT  [STAND-OFF-TIGHT]  13.97,30.23 270 top
H23  STAND-OFFTIGHT  [STAND-OFF-TIGHT]  30.48,45.47 270 top
H24  STAND-OFFTIGHT  [STAND-OFF-TIGHT]  30.48,30.23 270 top
H25  STAND-OFFTIGHT  [STAND-OFF-TIGHT]  46.99,45.47 270 top
H26  STAND-OFFTIGHT  [STAND-OFF-TIGHT]  46.99,30.23 270 top
H27  STAND-OFFTIGHT  [STAND-OFF-TIGHT]  63.5,45.47 270 top
H28  STAND-OFFTIGHT  [STAND-OFF-TIGHT]  63.5,30.23 270 top
H29  STAND-OFFTIGHT  [STAND-OFF-TIGHT]  80.01,45.47 270 top
H30  STAND-OFFTIGHT  [STAND-OFF-TIGHT]  80.01,30.23 270 top
H31  STAND-OFFTIGHT  [STAND-OFF-TIGHT]  96.52,45.47 270 top
H32  STAND-OFFTIGHT  [STAND-OFF-TIGHT]  96.52,30.23 270 top
H33  STAND-OFFTIGHT  [STAND-OFF-TIGHT]  113.03,45.47 270 top
H34  STAND-OFFTIGHT  [STAND-OFF-TIGHT]  113.03,30.23 270 top
H35  STAND-OFFTIGHT  [STAND-OFF-TIGHT]  129.54,45.47 270 top
H36  STAND-OFFTIGHT  [STAND-OFF-TIGHT]  129.54,30.23 270 top
H37  STAND-OFFTIGHT  [STAND-OFF-TIGHT]  146.05,45.47 270 top
H38  STAND-OFFTIGHT  [STAND-OFF-TIGHT]  146.05,30.23 270 top
H39  STAND-OFFTIGHT  [STAND-OFF-TIGHT]  162.56,45.47 270 top
H40  STAND-OFFTIGHT  [STAND-OFF-TIGHT]  162.56,30.23 270 top
H41  STAND-OFFTIGHT  [STAND-OFF-TIGHT]  13.97,66.29 270 top
H42  STAND-OFFTIGHT  [STAND-OFF-TIGHT]  13.97,51.05 270 top
H43  STAND-OFFTIGHT  [STAND-OFF-TIGHT]  30.48,66.29 270 top
H44  STAND-OFFTIGHT  [STAND-OFF-TIGHT]  30.48,51.05 270 top
H45  STAND-OFFTIGHT  [STAND-OFF-TIGHT]  46.99,66.29 270 top
H46  STAND-OFFTIGHT  [STAND-OFF-TIGHT]  46.99,51.05 270 top
H47  STAND-OFFTIGHT  [STAND-OFF-TIGHT]  63.5,66.29 270 top
H48  STAND-OFFTIGHT  [STAND-OFF-TIGHT]  63.5,51.05 270 top
H49  STAND-OFFTIGHT  [STAND-OFF-TIGHT]  80.01,66.29 270 top
H50  STAND-OFFTIGHT  [STAND-OFF-TIGHT]  80.01,51.05 270 top
H51  STAND-OFFTIGHT  [STAND-OFF-TIGHT]  96.52,66.29 270 top
H52  STAND-OFFTIGHT  [STAND-OFF-TIGHT]  96.52,51.05 270 top
H53  STAND-OFFTIGHT  [STAND-OFF-TIGHT]  113.03,66.29 270 top
H54  STAND-OFFTIGHT  [STAND-OFF-TIGHT]  113.03,51.05 270 top
H55  STAND-OFFTIGHT  [STAND-OFF-TIGHT]  129.54,66.29 270 top
H56  STAND-OFFTIGHT  [STAND-OFF-TIGHT]  129.54,51.05 270 top
H57  STAND-OFFTIGHT  [STAND-OFF-TIGHT]  146.05,66.29 270 top
H58  STAND-OFFTIGHT  [STAND-OFF-TIGHT]  146.05,51.05 270 top
H59  STAND-OFFTIGHT  [STAND-OFF-TIGHT]  162.56,66.29 270 top
H60  STAND-OFFTIGHT  [STAND-OFF-TIGHT]  162.56,51.05 270 top
H61  STAND-OFFTIGHT  [STAND-OFF-TIGHT]  13.97,87.12 270 top
H62  STAND-OFFTIGHT  [STAND-OFF-TIGHT]  13.97,71.88 270 top
H63  STAND-OFFTIGHT  [STAND-OFF-TIGHT]  30.48,87.12 270 top
H64  STAND-OFFTIGHT  [STAND-OFF-TIGHT]  30.48,71.88 270 top
H65  STAND-OFFTIGHT  [STAND-OFF-TIGHT]  46.99,87.12 270 top
H66  STAND-OFFTIGHT  [STAND-OFF-TIGHT]  46.99,71.88 270 top
H67  STAND-OFFTIGHT  [STAND-OFF-TIGHT]  63.5,87.12 270 top
H68  STAND-OFFTIGHT  [STAND-OFF-TIGHT]  63.5,71.88 270 top
H69  STAND-OFFTIGHT  [STAND-OFF-TIGHT]  80.01,87.12 270 top
H70  STAND-OFFTIGHT  [STAND-OFF-TIGHT]  80.01,71.88 270 top
H71  STAND-OFFTIGHT  [STAND-OFF-TIGHT]  96.52,87.12 270 top
H72  STAND-OFFTIGHT  [STAND-OFF-TIGHT]  96.52,71.88 270 top
H73  STAND-OFFTIGHT  [STAND-OFF-TIGHT]  113.03,87.12 270 top
H74  STAND-OFFTIGHT  [STAND-OFF-TIGHT]  113.03,71.88 270 top
H75  STAND-OFFTIGHT  [STAND-OFF-TIGHT]  129.54,87.12 270 top
H76  STAND-OFFTIGHT  [STAND-OFF-TIGHT]  129.54,71.88 270 top
H77  STAND-OFFTIGHT  [STAND-OFF-TIGHT]  146.05,87.12 270 top
H78  STAND-OFFTIGHT  [STAND-OFF-TIGHT]  146.05,71.88 270 top
H79  STAND-OFFTIGHT  [STAND-OFF-TIGHT]  162.56,87.12 270 top
H80  STAND-OFFTIGHT  [STAND-OFF-TIGHT]  162.56,71.88 270 top
H81  STAND-OFFTIGHT  [STAND-OFF-TIGHT]  13.97,107.95 270 top
H82  STAND-OFFTIGHT  [STAND-OFF-TIGHT]  13.97,92.71 270 top
H83  STAND-OFFTIGHT  [STAND-OFF-TIGHT]  30.48,107.95 270 top
H84  STAND-OFFTIGHT  [STAND-OFF-TIGHT]  30.48,92.71 270 top
H85  STAND-OFFTIGHT  [STAND-OFF-TIGHT]  46.99,107.95 270 top
H86  STAND-OFFTIGHT  [STAND-OFF-TIGHT]  46.99,92.71 270 top
H87  STAND-OFFTIGHT  [STAND-OFF-TIGHT]  63.5,107.95 270 top
H88  STAND-OFFTIGHT  [STAND-OFF-TIGHT]  63.5,92.71 270 top
H89  STAND-OFFTIGHT  [STAND-OFF-TIGHT]  80.01,107.95 270 top
H90  STAND-OFFTIGHT  [STAND-OFF-TIGHT]  80.01,92.71 270 top
H91  STAND-OFFTIGHT  [STAND-OFF-TIGHT]  96.52,107.95 270 top
H92  STAND-OFFTIGHT  [STAND-OFF-TIGHT]  96.52,92.71 270 top
H93  STAND-OFFTIGHT  [STAND-OFF-TIGHT]  113.03,107.95 270 top
H94  STAND-OFFTIGHT  [STAND-OFF-TIGHT]  113.03,92.71 270 top
H95  STAND-OFFTIGHT  [STAND-OFF-TIGHT]  129.54,107.95 270 top
H96  STAND-OFFTIGHT  [STAND-OFF-TIGHT]  129.54,92.71 270 top
H97  STAND-OFFTIGHT  [STAND-OFF-TIGHT]  146.05,107.95 270 top
H98  STAND-OFFTIGHT  [STAND-OFF-TIGHT]  146.05,92.71 270 top
H99  STAND-OFFTIGHT  [STAND-OFF-TIGHT]  162.56,107.95 270 top
H100  STAND-OFFTIGHT  [STAND-OFF-TIGHT]  162.56,92.71 270 top
H101  STAND-OFFTIGHT  [STAND-OFF-TIGHT]  13.97,128.78 270 top
H102  STAND-OFFTIGHT  [STAND-OFF-TIGHT]  13.97,113.54 270 top
H103  STAND-OFFTIGHT  [STAND-OFF-TIGHT]  30.48,128.78 270 top
H104  STAND-OFFTIGHT  [STAND-OFF-TIGHT]  30.48,113.54 270 top
H105  STAND-OFFTIGHT  [STAND-OFF-TIGHT]  46.99,128.78 270 top
H106  STAND-OFFTIGHT  [STAND-OFF-TIGHT]  46.99,113.54 270 top
H107  STAND-OFFTIGHT  [STAND-OFF-TIGHT]  63.5,128.78 270 top
H108  STAND-OFFTIGHT  [STAND-OFF-TIGHT]  63.5,113.54 270 top
H109  STAND-OFFTIGHT  [STAND-OFF-TIGHT]  80.01,128.78 270 top
H110  STAND-OFFTIGHT  [STAND-OFF-TIGHT]  80.01,113.54 270 top
H111  STAND-OFFTIGHT  [STAND-OFF-TIGHT]  96.52,128.78 270 top
H112  STAND-OFFTIGHT  [STAND-OFF-TIGHT]  96.52,113.54 270 top
H113  STAND-OFFTIGHT  [STAND-OFF-TIGHT]  113.03,128.78 270 top
H114  STAND-OFFTIGHT  [STAND-OFF-TIGHT]  113.03,113.54 270 top
H115  STAND-OFFTIGHT  [STAND-OFF-TIGHT]  129.54,128.78 270 top
H116  STAND-OFFTIGHT  [STAND-OFF-TIGHT]  129.54,113.54 270 top
H117  STAND-OFFTIGHT  [STAND-OFF-TIGHT]  146.05,128.78 270 top
H118  STAND-OFFTIGHT  [STAND-OFF-TIGHT]  146.05,113.54 270 top
H119  STAND-OFFTIGHT  [STAND-OFF-TIGHT]  162.56,128.78 270 top
H120  STAND-OFFTIGHT  [STAND-OFF-TIGHT]  162.56,113.54 270 top
H121  STAND-OFFTIGHT  [STAND-OFF-TIGHT]  13.97,149.61 270 top
H122  STAND-OFFTIGHT  [STAND-OFF-TIGHT]  13.97,134.37 270 top
H123  STAND-OFFTIGHT  [STAND-OFF-TIGHT]  30.48,149.61 270 top
H124  STAND-OFFTIGHT  [STAND-OFF-TIGHT]  30.48,134.37 270 top
H125  STAND-OFFTIGHT  [STAND-OFF-TIGHT]  46.99,149.61 270 top
H126  STAND-OFFTIGHT  [STAND-OFF-TIGHT]  46.99,134.37 270 top
H127  STAND-OFFTIGHT  [STAND-OFF-TIGHT]  63.5,149.61 270 top
H128  STAND-OFFTIGHT  [STAND-OFF-TIGHT]  63.5,134.37 270 top
H129  STAND-OFFTIGHT  [STAND-OFF-TIGHT]  80.01,149.61 270 top
H130  STAND-OFFTIGHT  [STAND-OFF-TIGHT]  80.01,134.37 270 top
H131  STAND-OFFTIGHT  [STAND-OFF-TIGHT]  96.52,149.61 270 top
H132  STAND-OFFTIGHT  [STAND-OFF-TIGHT]  96.52,134.37 270 top
H133  STAND-OFFTIGHT  [STAND-OFF-TIGHT]  113.03,149.61 270 top
H134  STAND-OFFTIGHT  [STAND-OFF-TIGHT]  113.03,134.37 270 top
H135  STAND-OFFTIGHT  [STAND-OFF-TIGHT]  129.54,149.61 270 top
H136  STAND-OFFTIGHT  [STAND-OFF-TIGHT]  129.54,134.37 270 top
H137  STAND-OFFTIGHT  [STAND-OFF-TIGHT]  146.05,149.61 270 top
H138  STAND-OFFTIGHT  [STAND-OFF-TIGHT]  146.05,134.37 270 top
H139  STAND-OFFTIGHT  [STAND-OFF-TIGHT]  162.56,149.61 270 top
H140  STAND-OFFTIGHT  [STAND-OFF-TIGHT]  162.56,134.37 270 top
J1  [1X07_NO_SILK]  21.59,24.64 270 top
J2  [USB-C-8P-2LAYER-VERTICAL-PTH]  14.61,17.02 90 top
J3  [1X07_NO_SILK]  38.1,24.64 270 top
J4  [USB-C-8P-2LAYER-VERTICAL-PTH]  31.11,17.02 90 top
J5  [1X07_NO_SILK]  54.61,24.64 270 top
J6  [USB-C-8P-2LAYER-VERTICAL-PTH]  47.62,17.02 90 top
J7  [1X07_NO_SILK]  71.12,24.64 270 top
J8  [USB-C-8P-2LAYER-VERTICAL-PTH]  64.13,17.02 90 top
J9  [1X07_NO_SILK]  87.63,24.64 270 top
J10  [USB-C-8P-2LAYER-VERTICAL-PTH]  80.65,17.02 90 top
J11  [1X07_NO_SILK]  104.14,24.64 270 top
J12  [USB-C-8P-2LAYER-VERTICAL-PTH]  97.16,17.02 90 top
J13  [1X07_NO_SILK]  120.65,24.64 270 top
J14  [USB-C-8P-2LAYER-VERTICAL-PTH]  113.66,17.02 90 top
J15  [1X07_NO_SILK]  137.16,24.64 270 top
J16  [USB-C-8P-2LAYER-VERTICAL-PTH]  130.18,17.02 90 top
J17  [1X07_NO_SILK]  153.67,24.64 270 top
J18  [USB-C-8P-2LAYER-VERTICAL-PTH]  146.69,17.02 90 top
J19  [1X07_NO_SILK]  170.18,24.64 270 top
J20  [USB-C-8P-2LAYER-VERTICAL-PTH]  163.19,17.02 90 top
J21  [1X07_NO_SILK]  21.59,45.47 270 top
J22  [USB-C-8P-2LAYER-VERTICAL-PTH]  14.61,37.85 90 top
J23  [1X07_NO_SILK]  38.1,45.47 270 top
J24  [USB-C-8P-2LAYER-VERTICAL-PTH]  31.11,37.85 90 top
J25  [1X07_NO_SILK]  54.61,45.47 270 top
J26  [USB-C-8P-2LAYER-VERTICAL-PTH]  47.62,37.85 90 top
J27  [1X07_NO_SILK]  71.12,45.47 270 top
J28  [USB-C-8P-2LAYER-VERTICAL-PTH]  64.13,37.85 90 top
J29  [1X07_NO_SILK]  87.63,45.47 270 top
J30  [USB-C-8P-2LAYER-VERTICAL-PTH]  80.65,37.85 90 top
J31  [1X07_NO_SILK]  104.14,45.47 270 top
J32  [USB-C-8P-2LAYER-VERTICAL-PTH]  97.16,37.85 90 top
J33  [1X07_NO_SILK]  120.65,45.47 270 top
J34  [USB-C-8P-2LAYER-VERTICAL-PTH]  113.66,37.85 90 top
J35  [1X07_NO_SILK]  137.16,45.47 270 top
J36  [USB-C-8P-2LAYER-VERTICAL-PTH]  130.18,37.85 90 top
J37  [1X07_NO_SILK]  153.67,45.47 270 top
J38  [USB-C-8P-2LAYER-VERTICAL-PTH]  146.69,37.85 90 top
J39  [1X07_NO_SILK]  170.18,45.47 270 top
J40  [USB-C-8P-2LAYER-VERTICAL-PTH]  163.19,37.85 90 top
J41  [1X07_NO_SILK]  21.59,66.29 270 top
J42  [USB-C-8P-2LAYER-VERTICAL-PTH]  14.61,58.67 90 top
J43  [1X07_NO_SILK]  38.1,66.29 270 top
J44  [USB-C-8P-2LAYER-VERTICAL-PTH]  31.11,58.67 90 top
J45  [1X07_NO_SILK]  54.61,66.29 270 top
J46  [USB-C-8P-2LAYER-VERTICAL-PTH]  47.62,58.67 90 top
J47  [1X07_NO_SILK]  71.12,66.29 270 top
J48  [USB-C-8P-2LAYER-VERTICAL-PTH]  64.13,58.67 90 top
J49  [1X07_NO_SILK]  87.63,66.29 270 top
J50  [USB-C-8P-2LAYER-VERTICAL-PTH]  80.65,58.67 90 top
J51  [1X07_NO_SILK]  104.14,66.29 270 top
J52  [USB-C-8P-2LAYER-VERTICAL-PTH]  97.16,58.67 90 top
J53  [1X07_NO_SILK]  120.65,66.29 270 top
J54  [USB-C-8P-2LAYER-VERTICAL-PTH]  113.66,58.67 90 top
J55  [1X07_NO_SILK]  137.16,66.29 270 top
J56  [USB-C-8P-2LAYER-VERTICAL-PTH]  130.18,58.67 90 top
J57  [1X07_NO_SILK]  153.67,66.29 270 top
J58  [USB-C-8P-2LAYER-VERTICAL-PTH]  146.69,58.67 90 top
J59  [1X07_NO_SILK]  170.18,66.29 270 top
J60  [USB-C-8P-2LAYER-VERTICAL-PTH]  163.19,58.67 90 top
J61  [1X07_NO_SILK]  21.59,87.12 270 top
J62  [USB-C-8P-2LAYER-VERTICAL-PTH]  14.61,79.5 90 top
J63  [1X07_NO_SILK]  38.1,87.12 270 top
J64  [USB-C-8P-2LAYER-VERTICAL-PTH]  31.11,79.5 90 top
J65  [1X07_NO_SILK]  54.61,87.12 270 top
J66  [USB-C-8P-2LAYER-VERTICAL-PTH]  47.62,79.5 90 top
J67  [1X07_NO_SILK]  71.12,87.12 270 top
J68  [USB-C-8P-2LAYER-VERTICAL-PTH]  64.13,79.5 90 top
J69  [1X07_NO_SILK]  87.63,87.12 270 top
J70  [USB-C-8P-2LAYER-VERTICAL-PTH]  80.65,79.5 90 top
J71  [1X07_NO_SILK]  104.14,87.12 270 top
J72  [USB-C-8P-2LAYER-VERTICAL-PTH]  97.16,79.5 90 top
J73  [1X07_NO_SILK]  120.65,87.12 270 top
J74  [USB-C-8P-2LAYER-VERTICAL-PTH]  113.66,79.5 90 top
J75  [1X07_NO_SILK]  137.16,87.12 270 top
J76  [USB-C-8P-2LAYER-VERTICAL-PTH]  130.18,79.5 90 top
J77  [1X07_NO_SILK]  153.67,87.12 270 top
J78  [USB-C-8P-2LAYER-VERTICAL-PTH]  146.69,79.5 90 top
J79  [1X07_NO_SILK]  170.18,87.12 270 top
J80  [USB-C-8P-2LAYER-VERTICAL-PTH]  163.19,79.5 90 top
J81  [1X07_NO_SILK]  21.59,107.95 270 top
J82  [USB-C-8P-2LAYER-VERTICAL-PTH]  14.61,100.33 90 top
J83  [1X07_NO_SILK]  38.1,107.95 270 top
J84  [USB-C-8P-2LAYER-VERTICAL-PTH]  31.11,100.33 90 top
J85  [1X07_NO_SILK]  54.61,107.95 270 top
J86  [USB-C-8P-2LAYER-VERTICAL-PTH]  47.62,100.33 90 top
J87  [1X07_NO_SILK]  71.12,107.95 270 top
J88  [USB-C-8P-2LAYER-VERTICAL-PTH]  64.13,100.33 90 top
J89  [1X07_NO_SILK]  87.63,107.95 270 top
J90  [USB-C-8P-2LAYER-VERTICAL-PTH]  80.65,100.33 90 top
J91  [1X07_NO_SILK]  104.14,107.95 270 top
J92  [USB-C-8P-2LAYER-VERTICAL-PTH]  97.16,100.33 90 top
J93  [1X07_NO_SILK]  120.65,107.95 270 top
J94  [USB-C-8P-2LAYER-VERTICAL-PTH]  113.66,100.33 90 top
J95  [1X07_NO_SILK]  137.16,107.95 270 top
J96  [USB-C-8P-2LAYER-VERTICAL-PTH]  130.18,100.33 90 top
J97  [1X07_NO_SILK]  153.67,107.95 270 top
J98  [USB-C-8P-2LAYER-VERTICAL-PTH]  146.69,100.33 90 top
J99  [1X07_NO_SILK]  170.18,107.95 270 top
J100  [USB-C-8P-2LAYER-VERTICAL-PTH]  163.19,100.33 90 top
J101  [1X07_NO_SILK]  21.59,128.78 270 top
J102  [USB-C-8P-2LAYER-VERTICAL-PTH]  14.61,121.16 90 top
J103  [1X07_NO_SILK]  38.1,128.78 270 top
J104  [USB-C-8P-2LAYER-VERTICAL-PTH]  31.11,121.16 90 top
J105  [1X07_NO_SILK]  54.61,128.78 270 top
J106  [USB-C-8P-2LAYER-VERTICAL-PTH]  47.62,121.16 90 top
J107  [1X07_NO_SILK]  71.12,128.78 270 top
J108  [USB-C-8P-2LAYER-VERTICAL-PTH]  64.13,121.16 90 top
J109  [1X07_NO_SILK]  87.63,128.78 270 top
J110  [USB-C-8P-2LAYER-VERTICAL-PTH]  80.65,121.16 90 top
J111  [1X07_NO_SILK]  104.14,128.78 270 top
J112  [USB-C-8P-2LAYER-VERTICAL-PTH]  97.16,121.16 90 top
J113  [1X07_NO_SILK]  120.65,128.78 270 top
J114  [USB-C-8P-2LAYER-VERTICAL-PTH]  113.66,121.16 90 top
J115  [1X07_NO_SILK]  137.16,128.78 270 top
J116  [USB-C-8P-2LAYER-VERTICAL-PTH]  130.18,121.16 90 top
J117  [1X07_NO_SILK]  153.67,128.78 270 top
J118  [USB-C-8P-2LAYER-VERTICAL-PTH]  146.69,121.16 90 top
J119  [1X07_NO_SILK]  170.18,128.78 270 top
J120  [USB-C-8P-2LAYER-VERTICAL-PTH]  163.19,121.16 90 top
J121  [1X07_NO_SILK]  21.59,149.61 270 top
J122  [USB-C-8P-2LAYER-VERTICAL-PTH]  14.61,141.99 90 top
J123  [1X07_NO_SILK]  38.1,149.61 270 top
J124  [USB-C-8P-2LAYER-VERTICAL-PTH]  31.11,141.99 90 top
J125  [1X07_NO_SILK]  54.61,149.61 270 top
J126  [USB-C-8P-2LAYER-VERTICAL-PTH]  47.62,141.99 90 top
J127  [1X07_NO_SILK]  71.12,149.61 270 top
J128  [USB-C-8P-2LAYER-VERTICAL-PTH]  64.13,141.99 90 top
J129  [1X07_NO_SILK]  87.63,149.61 270 top
J130  [USB-C-8P-2LAYER-VERTICAL-PTH]  80.65,141.99 90 top
J131  [1X07_NO_SILK]  104.14,149.61 270 top
J132  [USB-C-8P-2LAYER-VERTICAL-PTH]  97.16,141.99 90 top
J133  [1X07_NO_SILK]  120.65,149.61 270 top
J134  [USB-C-8P-2LAYER-VERTICAL-PTH]  113.66,141.99 90 top
J135  [1X07_NO_SILK]  137.16,149.61 270 top
J136  [USB-C-8P-2LAYER-VERTICAL-PTH]  130.18,141.99 90 top
J137  [1X07_NO_SILK]  153.67,149.61 270 top
J138  [USB-C-8P-2LAYER-VERTICAL-PTH]  146.69,141.99 90 top
J139  [1X07_NO_SILK]  170.18,149.61 270 top
J140  [USB-C-8P-2LAYER-VERTICAL-PTH]  163.19,141.99 90 top
LOGO1  SFE_LOGO_NAME_FLAMEBLANK  [BLANK]  20.32,8.13 180 top
LOGO2  OSHW-LOGOMINI  [OSHW-LOGO-MINI]  13.08,12.19 0 bottom
LOGO3  SFE_LOGO_FLAME.1_INCH  [SFE_LOGO_FLAME_.1]  16.64,25.65 0 top
LOGO4  OSHW-LOGOMINI  [OSHW-LOGO-MINI]  29.59,12.19 0 bottom
LOGO5  SFE_LOGO_NAME_FLAMEBLANK  [BLANK]  36.83,8.13 180 top
LOGO6  SFE_LOGO_FLAME.1_INCH  [SFE_LOGO_FLAME_.1]  33.15,25.65 0 top
LOGO7  OSHW-LOGOMINI  [OSHW-LOGO-MINI]  46.1,12.19 0 bottom
LOGO8  SFE_LOGO_NAME_FLAMEBLANK  [BLANK]  53.34,8.13 180 top
LOGO9  SFE_LOGO_FLAME.1_INCH  [SFE_LOGO_FLAME_.1]  49.66,25.65 0 top
LOGO10  OSHW-LOGOMINI  [OSHW-LOGO-MINI]  62.61,12.19 0 bottom
LOGO11  SFE_LOGO_NAME_FLAMEBLANK  [BLANK]  69.85,8.13 180 top
LOGO12  SFE_LOGO_FLAME.1_INCH  [SFE_LOGO_FLAME_.1]  66.17,25.65 0 top
LOGO13  OSHW-LOGOMINI  [OSHW-LOGO-MINI]  79.12,12.19 0 bottom
LOGO14  SFE_LOGO_NAME_FLAMEBLANK  [BLANK]  86.36,8.13 180 top
LOGO15  SFE_LOGO_FLAME.1_INCH  [SFE_LOGO_FLAME_.1]  82.68,25.65 0 top
LOGO16  OSHW-LOGOMINI  [OSHW-LOGO-MINI]  95.63,12.19 0 bottom
LOGO17  SFE_LOGO_NAME_FLAMEBLANK  [BLANK]  102.87,8.13 180 top
LOGO18  SFE_LOGO_FLAME.1_INCH  [SFE_LOGO_FLAME_.1]  99.19,25.65 0 top
LOGO19  OSHW-LOGOMINI  [OSHW-LOGO-MINI]  112.14,12.19 0 bottom
LOGO20  SFE_LOGO_NAME_FLAMEBLANK  [BLANK]  119.38,8.13 180 top
LOGO21  SFE_LOGO_FLAME.1_INCH  [SFE_LOGO_FLAME_.1]  115.7,25.65 0 top
LOGO22  OSHW-LOGOMINI  [OSHW-LOGO-MINI]  128.65,12.19 0 bottom
LOGO23  SFE_LOGO_NAME_FLAMEBLANK  [BLANK]  135.89,8.13 180 top
LOGO24  SFE_LOGO_FLAME.1_INCH  [SFE_LOGO_FLAME_.1]  132.21,25.65 0 top
LOGO25  OSHW-LOGOMINI  [OSHW-LOGO-MINI]  145.16,12.19 0 bottom
LOGO26  SFE_LOGO_NAME_FLAMEBLANK  [BLANK]  152.4,8.13 180 top
LOGO27  SFE_LOGO_FLAME.1_INCH  [SFE_LOGO_FLAME_.1]  148.72,25.65 0 top
LOGO28  OSHW-LOGOMINI  [OSHW-LOGO-MINI]  161.67,12.19 0 bottom
LOGO29  SFE_LOGO_NAME_FLAMEBLANK  [BLANK]  168.91,8.13 180 top
LOGO30  SFE_LOGO_FLAME.1_INCH  [SFE_LOGO_FLAME_.1]  165.23,25.65 0 top
LOGO31  OSHW-LOGOMINI  [OSHW-LOGO-MINI]  13.08,33.02 0 bottom
LOGO32  SFE_LOGO_NAME_FLAMEBLANK  [BLANK]  20.32,28.96 180 top
LOGO33  SFE_LOGO_FLAME.1_INCH  [SFE_LOGO_FLAME_.1]  16.64,46.48 0 top
LOGO34  OSHW-LOGOMINI  [OSHW-LOGO-MINI]  29.59,33.02 0 bottom
LOGO35  SFE_LOGO_NAME_FLAMEBLANK  [BLANK]  36.83,28.96 180 top
LOGO36  SFE_LOGO_FLAME.1_INCH  [SFE_LOGO_FLAME_.1]  33.15,46.48 0 top
LOGO37  OSHW-LOGOMINI  [OSHW-LOGO-MINI]  46.1,33.02 0 bottom
LOGO38  SFE_LOGO_NAME_FLAMEBLANK  [BLANK]  53.34,28.96 180 top
LOGO39  SFE_LOGO_FLAME.1_INCH  [SFE_LOGO_FLAME_.1]  49.66,46.48 0 top
LOGO40  OSHW-LOGOMINI  [OSHW-LOGO-MINI]  62.61,33.02 0 bottom
LOGO41  SFE_LOGO_NAME_FLAMEBLANK  [BLANK]  69.85,28.96 180 top
LOGO42  SFE_LOGO_FLAME.1_INCH  [SFE_LOGO_FLAME_.1]  66.17,46.48 0 top
LOGO43  OSHW-LOGOMINI  [OSHW-LOGO-MINI]  79.12,33.02 0 bottom
LOGO44  SFE_LOGO_NAME_FLAMEBLANK  [BLANK]  86.36,28.96 180 top
LOGO45  SFE_LOGO_FLAME.1_INCH  [SFE_LOGO_FLAME_.1]  82.68,46.48 0 top
LOGO46  OSHW-LOGOMINI  [OSHW-LOGO-MINI]  95.63,33.02 0 bottom
LOGO47  SFE_LOGO_NAME_FLAMEBLANK  [BLANK]  102.87,28.96 180 top
LOGO48  SFE_LOGO_FLAME.1_INCH  [SFE_LOGO_FLAME_.1]  99.19,46.48 0 top
LOGO49  OSHW-LOGOMINI  [OSHW-LOGO-MINI]  112.14,33.02 0 bottom
LOGO50  SFE_LOGO_NAME_FLAMEBLANK  [BLANK]  119.38,28.96 180 top
LOGO51  SFE_LOGO_FLAME.1_INCH  [SFE_LOGO_FLAME_.1]  115.7,46.48 0 top
LOGO52  OSHW-LOGOMINI  [OSHW-LOGO-MINI]  128.65,33.02 0 bottom
LOGO53  SFE_LOGO_NAME_FLAMEBLANK  [BLANK]  135.89,28.96 180 top
LOGO54  SFE_LOGO_FLAME.1_INCH  [SFE_LOGO_FLAME_.1]  132.21,46.48 0 top
LOGO55  OSHW-LOGOMINI  [OSHW-LOGO-MINI]  145.16,33.02 0 bottom
LOGO56  SFE_LOGO_NAME_FLAMEBLANK  [BLANK]  152.4,28.96 180 top
LOGO57  SFE_LOGO_FLAME.1_INCH  [SFE_LOGO_FLAME_.1]  148.72,46.48 0 top
LOGO58  OSHW-LOGOMINI  [OSHW-LOGO-MINI]  161.67,33.02 0 bottom
LOGO59  SFE_LOGO_NAME_FLAMEBLANK  [BLANK]  168.91,28.96 180 top
LOGO60  SFE_LOGO_FLAME.1_INCH  [SFE_LOGO_FLAME_.1]  165.23,46.48 0 top
LOGO61  OSHW-LOGOMINI  [OSHW-LOGO-MINI]  13.08,53.85 0 bottom
LOGO62  SFE_LOGO_NAME_FLAMEBLANK  [BLANK]  20.32,49.78 180 top
LOGO63  SFE_LOGO_FLAME.1_INCH  [SFE_LOGO_FLAME_.1]  16.64,67.31 0 top
LOGO64  OSHW-LOGOMINI  [OSHW-LOGO-MINI]  29.59,53.85 0 bottom
LOGO65  SFE_LOGO_NAME_FLAMEBLANK  [BLANK]  36.83,49.78 180 top
LOGO66  SFE_LOGO_FLAME.1_INCH  [SFE_LOGO_FLAME_.1]  33.15,67.31 0 top
LOGO67  OSHW-LOGOMINI  [OSHW-LOGO-MINI]  46.1,53.85 0 bottom
LOGO68  SFE_LOGO_NAME_FLAMEBLANK  [BLANK]  53.34,49.78 180 top
LOGO69  SFE_LOGO_FLAME.1_INCH  [SFE_LOGO_FLAME_.1]  49.66,67.31 0 top
LOGO70  OSHW-LOGOMINI  [OSHW-LOGO-MINI]  62.61,53.85 0 bottom
LOGO71  SFE_LOGO_NAME_FLAMEBLANK  [BLANK]  69.85,49.78 180 top
LOGO72  SFE_LOGO_FLAME.1_INCH  [SFE_LOGO_FLAME_.1]  66.17,67.31 0 top
LOGO73  OSHW-LOGOMINI  [OSHW-LOGO-MINI]  79.12,53.85 0 bottom
LOGO74  SFE_LOGO_NAME_FLAMEBLANK  [BLANK]  86.36,49.78 180 top
LOGO75  SFE_LOGO_FLAME.1_INCH  [SFE_LOGO_FLAME_.1]  82.68,67.31 0 top
LOGO76  OSHW-LOGOMINI  [OSHW-LOGO-MINI]  95.63,53.85 0 bottom
LOGO77  SFE_LOGO_NAME_FLAMEBLANK  [BLANK]  102.87,49.78 180 top
LOGO78  SFE_LOGO_FLAME.1_INCH  [SFE_LOGO_FLAME_.1]  99.19,67.31 0 top
LOGO79  OSHW-LOGOMINI  [OSHW-LOGO-MINI]  112.14,53.85 0 bottom
LOGO80  SFE_LOGO_NAME_FLAMEBLANK  [BLANK]  119.38,49.78 180 top
LOGO81  SFE_LOGO_FLAME.1_INCH  [SFE_LOGO_FLAME_.1]  115.7,67.31 0 top
LOGO82  OSHW-LOGOMINI  [OSHW-LOGO-MINI]  128.65,53.85 0 bottom
LOGO83  SFE_LOGO_NAME_FLAMEBLANK  [BLANK]  135.89,49.78 180 top
LOGO84  SFE_LOGO_FLAME.1_INCH  [SFE_LOGO_FLAME_.1]  132.21,67.31 0 top
LOGO85  OSHW-LOGOMINI  [OSHW-LOGO-MINI]  145.16,53.85 0 bottom
LOGO86  SFE_LOGO_NAME_FLAMEBLANK  [BLANK]  152.4,49.78 180 top
LOGO87  SFE_LOGO_FLAME.1_INCH  [SFE_LOGO_FLAME_.1]  148.72,67.31 0 top
LOGO88  OSHW-LOGOMINI  [OSHW-LOGO-MINI]  161.67,53.85 0 bottom
LOGO89  SFE_LOGO_NAME_FLAMEBLANK  [BLANK]  168.91,49.78 180 top
LOGO90  SFE_LOGO_FLAME.1_INCH  [SFE_LOGO_FLAME_.1]  165.23,67.31 0 top
LOGO91  OSHW-LOGOMINI  [OSHW-LOGO-MINI]  13.08,74.68 0 bottom
LOGO92  SFE_LOGO_NAME_FLAMEBLANK  [BLANK]  20.32,70.61 180 top
LOGO93  SFE_LOGO_FLAME.1_INCH  [SFE_LOGO_FLAME_.1]  16.64,88.14 0 top
LOGO94  OSHW-LOGOMINI  [OSHW-LOGO-MINI]  29.59,74.68 0 bottom
LOGO95  SFE_LOGO_NAME_FLAMEBLANK  [BLANK]  36.83,70.61 180 top
LOGO96  SFE_LOGO_FLAME.1_INCH  [SFE_LOGO_FLAME_.1]  33.15,88.14 0 top
LOGO97  OSHW-LOGOMINI  [OSHW-LOGO-MINI]  46.1,74.68 0 bottom
LOGO98  SFE_LOGO_NAME_FLAMEBLANK  [BLANK]  53.34,70.61 180 top
LOGO99  SFE_LOGO_FLAME.1_INCH  [SFE_LOGO_FLAME_.1]  49.66,88.14 0 top
LOGO100  OSHW-LOGOMINI  [OSHW-LOGO-MINI]  62.61,74.68 0 bottom
LOGO101  SFE_LOGO_NAME_FLAMEBLANK  [BLANK]  69.85,70.61 180 top
LOGO102  SFE_LOGO_FLAME.1_INCH  [SFE_LOGO_FLAME_.1]  66.17,88.14 0 top
LOGO103  OSHW-LOGOMINI  [OSHW-LOGO-MINI]  79.12,74.68 0 bottom
LOGO104  SFE_LOGO_NAME_FLAMEBLANK  [BLANK]  86.36,70.61 180 top
LOGO105  SFE_LOGO_FLAME.1_INCH  [SFE_LOGO_FLAME_.1]  82.68,88.14 0 top
LOGO106  OSHW-LOGOMINI  [OSHW-LOGO-MINI]  95.63,74.68 0 bottom
LOGO107  SFE_LOGO_NAME_FLAMEBLANK  [BLANK]  102.87,70.61 180 top
LOGO108  SFE_LOGO_FLAME.1_INCH  [SFE_LOGO_FLAME_.1]  99.19,88.14 0 top
LOGO109  OSHW-LOGOMINI  [OSHW-LOGO-MINI]  112.14,74.68 0 bottom
LOGO110  SFE_LOGO_NAME_FLAMEBLANK  [BLANK]  119.38,70.61 180 top
LOGO111  SFE_LOGO_FLAME.1_INCH  [SFE_LOGO_FLAME_.1]  115.7,88.14 0 top
LOGO112  OSHW-LOGOMINI  [OSHW-LOGO-MINI]  128.65,74.68 0 bottom
LOGO113  SFE_LOGO_NAME_FLAMEBLANK  [BLANK]  135.89,70.61 180 top
LOGO114  SFE_LOGO_FLAME.1_INCH  [SFE_LOGO_FLAME_.1]  132.21,88.14 0 top
LOGO115  OSHW-LOGOMINI  [OSHW-LOGO-MINI]  145.16,74.68 0 bottom
LOGO116  SFE_LOGO_NAME_FLAMEBLANK  [BLANK]  152.4,70.61 180 top
LOGO117  SFE_LOGO_FLAME.1_INCH  [SFE_LOGO_FLAME_.1]  148.72,88.14 0 top
LOGO118  OSHW-LOGOMINI  [OSHW-LOGO-MINI]  161.67,74.68 0 bottom
LOGO119  SFE_LOGO_NAME_FLAMEBLANK  [BLANK]  168.91,70.61 180 top
LOGO120  SFE_LOGO_FLAME.1_INCH  [SFE_LOGO_FLAME_.1]  165.23,88.14 0 top
LOGO121  OSHW-LOGOMINI  [OSHW-LOGO-MINI]  13.08,95.5 0 bottom
LOGO122  SFE_LOGO_NAME_FLAMEBLANK  [BLANK]  20.32,91.44 180 top
LOGO123  SFE_LOGO_FLAME.1_INCH  [SFE_LOGO_FLAME_.1]  16.64,108.97 0 top
LOGO124  OSHW-LOGOMINI  [OSHW-LOGO-MINI]  29.59,95.5 0 bottom
LOGO125  SFE_LOGO_NAME_FLAMEBLANK  [BLANK]  36.83,91.44 180 top
LOGO126  SFE_LOGO_FLAME.1_INCH  [SFE_LOGO_FLAME_.1]  33.15,108.97 0 top
LOGO127  OSHW-LOGOMINI  [OSHW-LOGO-MINI]  46.1,95.5 0 bottom
LOGO128  SFE_LOGO_NAME_FLAMEBLANK  [BLANK]  53.34,91.44 180 top
LOGO129  SFE_LOGO_FLAME.1_INCH  [SFE_LOGO_FLAME_.1]  49.66,108.97 0 top
LOGO130  OSHW-LOGOMINI  [OSHW-LOGO-MINI]  62.61,95.5 0 bottom
LOGO131  SFE_LOGO_NAME_FLAMEBLANK  [BLANK]  69.85,91.44 180 top
LOGO132  SFE_LOGO_FLAME.1_INCH  [SFE_LOGO_FLAME_.1]  66.17,108.97 0 top
LOGO133  OSHW-LOGOMINI  [OSHW-LOGO-MINI]  79.12,95.5 0 bottom
LOGO134  SFE_LOGO_NAME_FLAMEBLANK  [BLANK]  86.36,91.44 180 top
LOGO135  SFE_LOGO_FLAME.1_INCH  [SFE_LOGO_FLAME_.1]  82.68,108.97 0 top
LOGO136  OSHW-LOGOMINI  [OSHW-LOGO-MINI]  95.63,95.5 0 bottom
LOGO137  SFE_LOGO_NAME_FLAMEBLANK  [BLANK]  102.87,91.44 180 top
LOGO138  SFE_LOGO_FLAME.1_INCH  [SFE_LOGO_FLAME_.1]  99.19,108.97 0 top
LOGO139  OSHW-LOGOMINI  [OSHW-LOGO-MINI]  112.14,95.5 0 bottom
LOGO140  SFE_LOGO_NAME_FLAMEBLANK  [BLANK]  119.38,91.44 180 top
LOGO141  SFE_LOGO_FLAME.1_INCH  [SFE_LOGO_FLAME_.1]  115.7,108.97 0 top
LOGO142  OSHW-LOGOMINI  [OSHW-LOGO-MINI]  128.65,95.5 0 bottom
LOGO143  SFE_LOGO_NAME_FLAMEBLANK  [BLANK]  135.89,91.44 180 top
LOGO144  SFE_LOGO_FLAME.1_INCH  [SFE_LOGO_FLAME_.1]  132.21,108.97 0 top
LOGO145  OSHW-LOGOMINI  [OSHW-LOGO-MINI]  145.16,95.5 0 bottom
LOGO146  SFE_LOGO_NAME_FLAMEBLANK  [BLANK]  152.4,91.44 180 top
LOGO147  SFE_LOGO_FLAME.1_INCH  [SFE_LOGO_FLAME_.1]  148.72,108.97 0 top
LOGO148  OSHW-LOGOMINI  [OSHW-LOGO-MINI]  161.67,95.5 0 bottom
LOGO149  SFE_LOGO_NAME_FLAMEBLANK  [BLANK]  168.91,91.44 180 top
LOGO150  SFE_LOGO_FLAME.1_INCH  [SFE_LOGO_FLAME_.1]  165.23,108.97 0 top
LOGO151  OSHW-LOGOMINI  [OSHW-LOGO-MINI]  13.08,116.33 0 bottom
LOGO152  SFE_LOGO_NAME_FLAMEBLANK  [BLANK]  20.32,112.27 180 top
LOGO153  SFE_LOGO_FLAME.1_INCH  [SFE_LOGO_FLAME_.1]  16.64,129.79 0 top
LOGO154  OSHW-LOGOMINI  [OSHW-LOGO-MINI]  29.59,116.33 0 bottom
LOGO155  SFE_LOGO_NAME_FLAMEBLANK  [BLANK]  36.83,112.27 180 top
LOGO156  SFE_LOGO_FLAME.1_INCH  [SFE_LOGO_FLAME_.1]  33.15,129.79 0 top
LOGO157  OSHW-LOGOMINI  [OSHW-LOGO-MINI]  46.1,116.33 0 bottom
LOGO158  SFE_LOGO_NAME_FLAMEBLANK  [BLANK]  53.34,112.27 180 top
LOGO159  SFE_LOGO_FLAME.1_INCH  [SFE_LOGO_FLAME_.1]  49.66,129.79 0 top
LOGO160  OSHW-LOGOMINI  [OSHW-LOGO-MINI]  62.61,116.33 0 bottom
LOGO161  SFE_LOGO_NAME_FLAMEBLANK  [BLANK]  69.85,112.27 180 top
LOGO162  SFE_LOGO_FLAME.1_INCH  [SFE_LOGO_FLAME_.1]  66.17,129.79 0 top
LOGO163  OSHW-LOGOMINI  [OSHW-LOGO-MINI]  79.12,116.33 0 bottom
LOGO164  SFE_LOGO_NAME_FLAMEBLANK  [BLANK]  86.36,112.27 180 top
LOGO165  SFE_LOGO_FLAME.1_INCH  [SFE_LOGO_FLAME_.1]  82.68,129.79 0 top
LOGO166  OSHW-LOGOMINI  [OSHW-LOGO-MINI]  95.63,116.33 0 bottom
LOGO167  SFE_LOGO_NAME_FLAMEBLANK  [BLANK]  102.87,112.27 180 top
LOGO168  SFE_LOGO_FLAME.1_INCH  [SFE_LOGO_FLAME_.1]  99.19,129.79 0 top
LOGO169  OSHW-LOGOMINI  [OSHW-LOGO-MINI]  112.14,116.33 0 bottom
LOGO170  SFE_LOGO_NAME_FLAMEBLANK  [BLANK]  119.38,112.27 180 top
LOGO171  SFE_LOGO_FLAME.1_INCH  [SFE_LOGO_FLAME_.1]  115.7,129.79 0 top
LOGO172  OSHW-LOGOMINI  [OSHW-LOGO-MINI]  128.65,116.33 0 bottom
LOGO173  SFE_LOGO_NAME_FLAMEBLANK  [BLANK]  135.89,112.27 180 top
LOGO174  SFE_LOGO_FLAME.1_INCH  [SFE_LOGO_FLAME_.1]  132.21,129.79 0 top
LOGO175  OSHW-LOGOMINI  [OSHW-LOGO-MINI]  145.16,116.33 0 bottom
LOGO176  SFE_LOGO_NAME_FLAMEBLANK  [BLANK]  152.4,112.27 180 top
LOGO177  SFE_LOGO_FLAME.1_INCH  [SFE_LOGO_FLAME_.1]  148.72,129.79 0 top
LOGO178  OSHW-LOGOMINI  [OSHW-LOGO-MINI]  161.67,116.33 0 bottom
LOGO179  SFE_LOGO_NAME_FLAMEBLANK  [BLANK]  168.91,112.27 180 top
LOGO180  SFE_LOGO_FLAME.1_INCH  [SFE_LOGO_FLAME_.1]  165.23,129.79 0 top
LOGO181  OSHW-LOGOMINI  [OSHW-LOGO-MINI]  13.08,137.16 0 bottom
LOGO182  SFE_LOGO_NAME_FLAMEBLANK  [BLANK]  20.32,133.1 180 top
LOGO183  SFE_LOGO_FLAME.1_INCH  [SFE_LOGO_FLAME_.1]  16.64,150.62 0 top
LOGO184  OSHW-LOGOMINI  [OSHW-LOGO-MINI]  29.59,137.16 0 bottom
LOGO185  SFE_LOGO_NAME_FLAMEBLANK  [BLANK]  36.83,133.1 180 top
LOGO186  SFE_LOGO_FLAME.1_INCH  [SFE_LOGO_FLAME_.1]  33.15,150.62 0 top
LOGO187  OSHW-LOGOMINI  [OSHW-LOGO-MINI]  46.1,137.16 0 bottom
LOGO188  SFE_LOGO_NAME_FLAMEBLANK  [BLANK]  53.34,133.1 180 top
LOGO189  SFE_LOGO_FLAME.1_INCH  [SFE_LOGO_FLAME_.1]  49.66,150.62 0 top
LOGO190  OSHW-LOGOMINI  [OSHW-LOGO-MINI]  62.61,137.16 0 bottom
LOGO191  SFE_LOGO_NAME_FLAMEBLANK  [BLANK]  69.85,133.1 180 top
LOGO192  SFE_LOGO_FLAME.1_INCH  [SFE_LOGO_FLAME_.1]  66.17,150.62 0 top
LOGO193  OSHW-LOGOMINI  [OSHW-LOGO-MINI]  79.12,137.16 0 bottom
LOGO194  SFE_LOGO_NAME_FLAMEBLANK  [BLANK]  86.36,133.1 180 top
LOGO195  SFE_LOGO_FLAME.1_INCH  [SFE_LOGO_FLAME_.1]  82.68,150.62 0 top
LOGO196  OSHW-LOGOMINI  [OSHW-LOGO-MINI]  95.63,137.16 0 bottom
LOGO197  SFE_LOGO_NAME_FLAMEBLANK  [BLANK]  102.87,133.1 180 top
LOGO198  SFE_LOGO_FLAME.1_INCH  [SFE_LOGO_FLAME_.1]  99.19,150.62 0 top
LOGO199  OSHW-LOGOMINI  [OSHW-LOGO-MINI]  112.14,137.16 0 bottom
LOGO200  SFE_LOGO_NAME_FLAMEBLANK  [BLANK]  119.38,133.1 180 top
LOGO201  SFE_LOGO_FLAME.1_INCH  [SFE_LOGO_FLAME_.1]  115.7,150.62 0 top
LOGO202  OSHW-LOGOMINI  [OSHW-LOGO-MINI]  128.65,137.16 0 bottom
LOGO203  SFE_LOGO_NAME_FLAMEBLANK  [BLANK]  135.89,133.1 180 top
LOGO204  SFE_LOGO_FLAME.1_INCH  [SFE_LOGO_FLAME_.1]  132.21,150.62 0 top
LOGO205  OSHW-LOGOMINI  [OSHW-LOGO-MINI]  145.16,137.16 0 bottom
LOGO206  SFE_LOGO_NAME_FLAMEBLANK  [BLANK]  152.4,133.1 180 top
LOGO207  SFE_LOGO_FLAME.1_INCH  [SFE_LOGO_FLAME_.1]  148.72,150.62 0 top
LOGO208  OSHW-LOGOMINI  [OSHW-LOGO-MINI]  161.67,137.16 0 bottom
LOGO209  SFE_LOGO_NAME_FLAMEBLANK  [BLANK]  168.91,133.1 180 top
LOGO210  SFE_LOGO_FLAME.1_INCH  [SFE_LOGO_FLAME_.1]  165.23,150.62 0 top
R1  5.1k  [0603]  18.41,10.67 180 bottom
R2  5.1k  [0603]  18.41,23.37 180 bottom
R3  5.1k  [0603]  34.92,10.67 180 bottom
R4  5.1k  [0603]  34.92,23.37 180 bottom
R5  5.1k  [0603]  51.44,10.67 180 bottom
R6  5.1k  [0603]  51.44,23.37 180 bottom
R7  5.1k  [0603]  67.94,10.67 180 bottom
R8  5.1k  [0603]  67.94,23.37 180 bottom
R9  5.1k  [0603]  84.46,10.67 180 bottom
R10  5.1k  [0603]  84.46,23.37 180 bottom